# Altium PCB pcb_take1.PcbDoc (part 1 of 3)
Units mm, origin at the board's own origin, x right, y up, seen from the top; angles counter-clockwise.
Board outline 120 x 150 mm, 10 copper layers (Top Layer, Mid-Layer 1, Internal Plane 1, Internal Plane 2, Mid-Layer 2, MidLayer3, Mid-Layer 4, Mid-Layer 5, Mid-Layer 6, Bottom Layer); 173 components, 196 nets, 996 pads, 586 vias.
Unrouted connection lines stored in the file: 1.
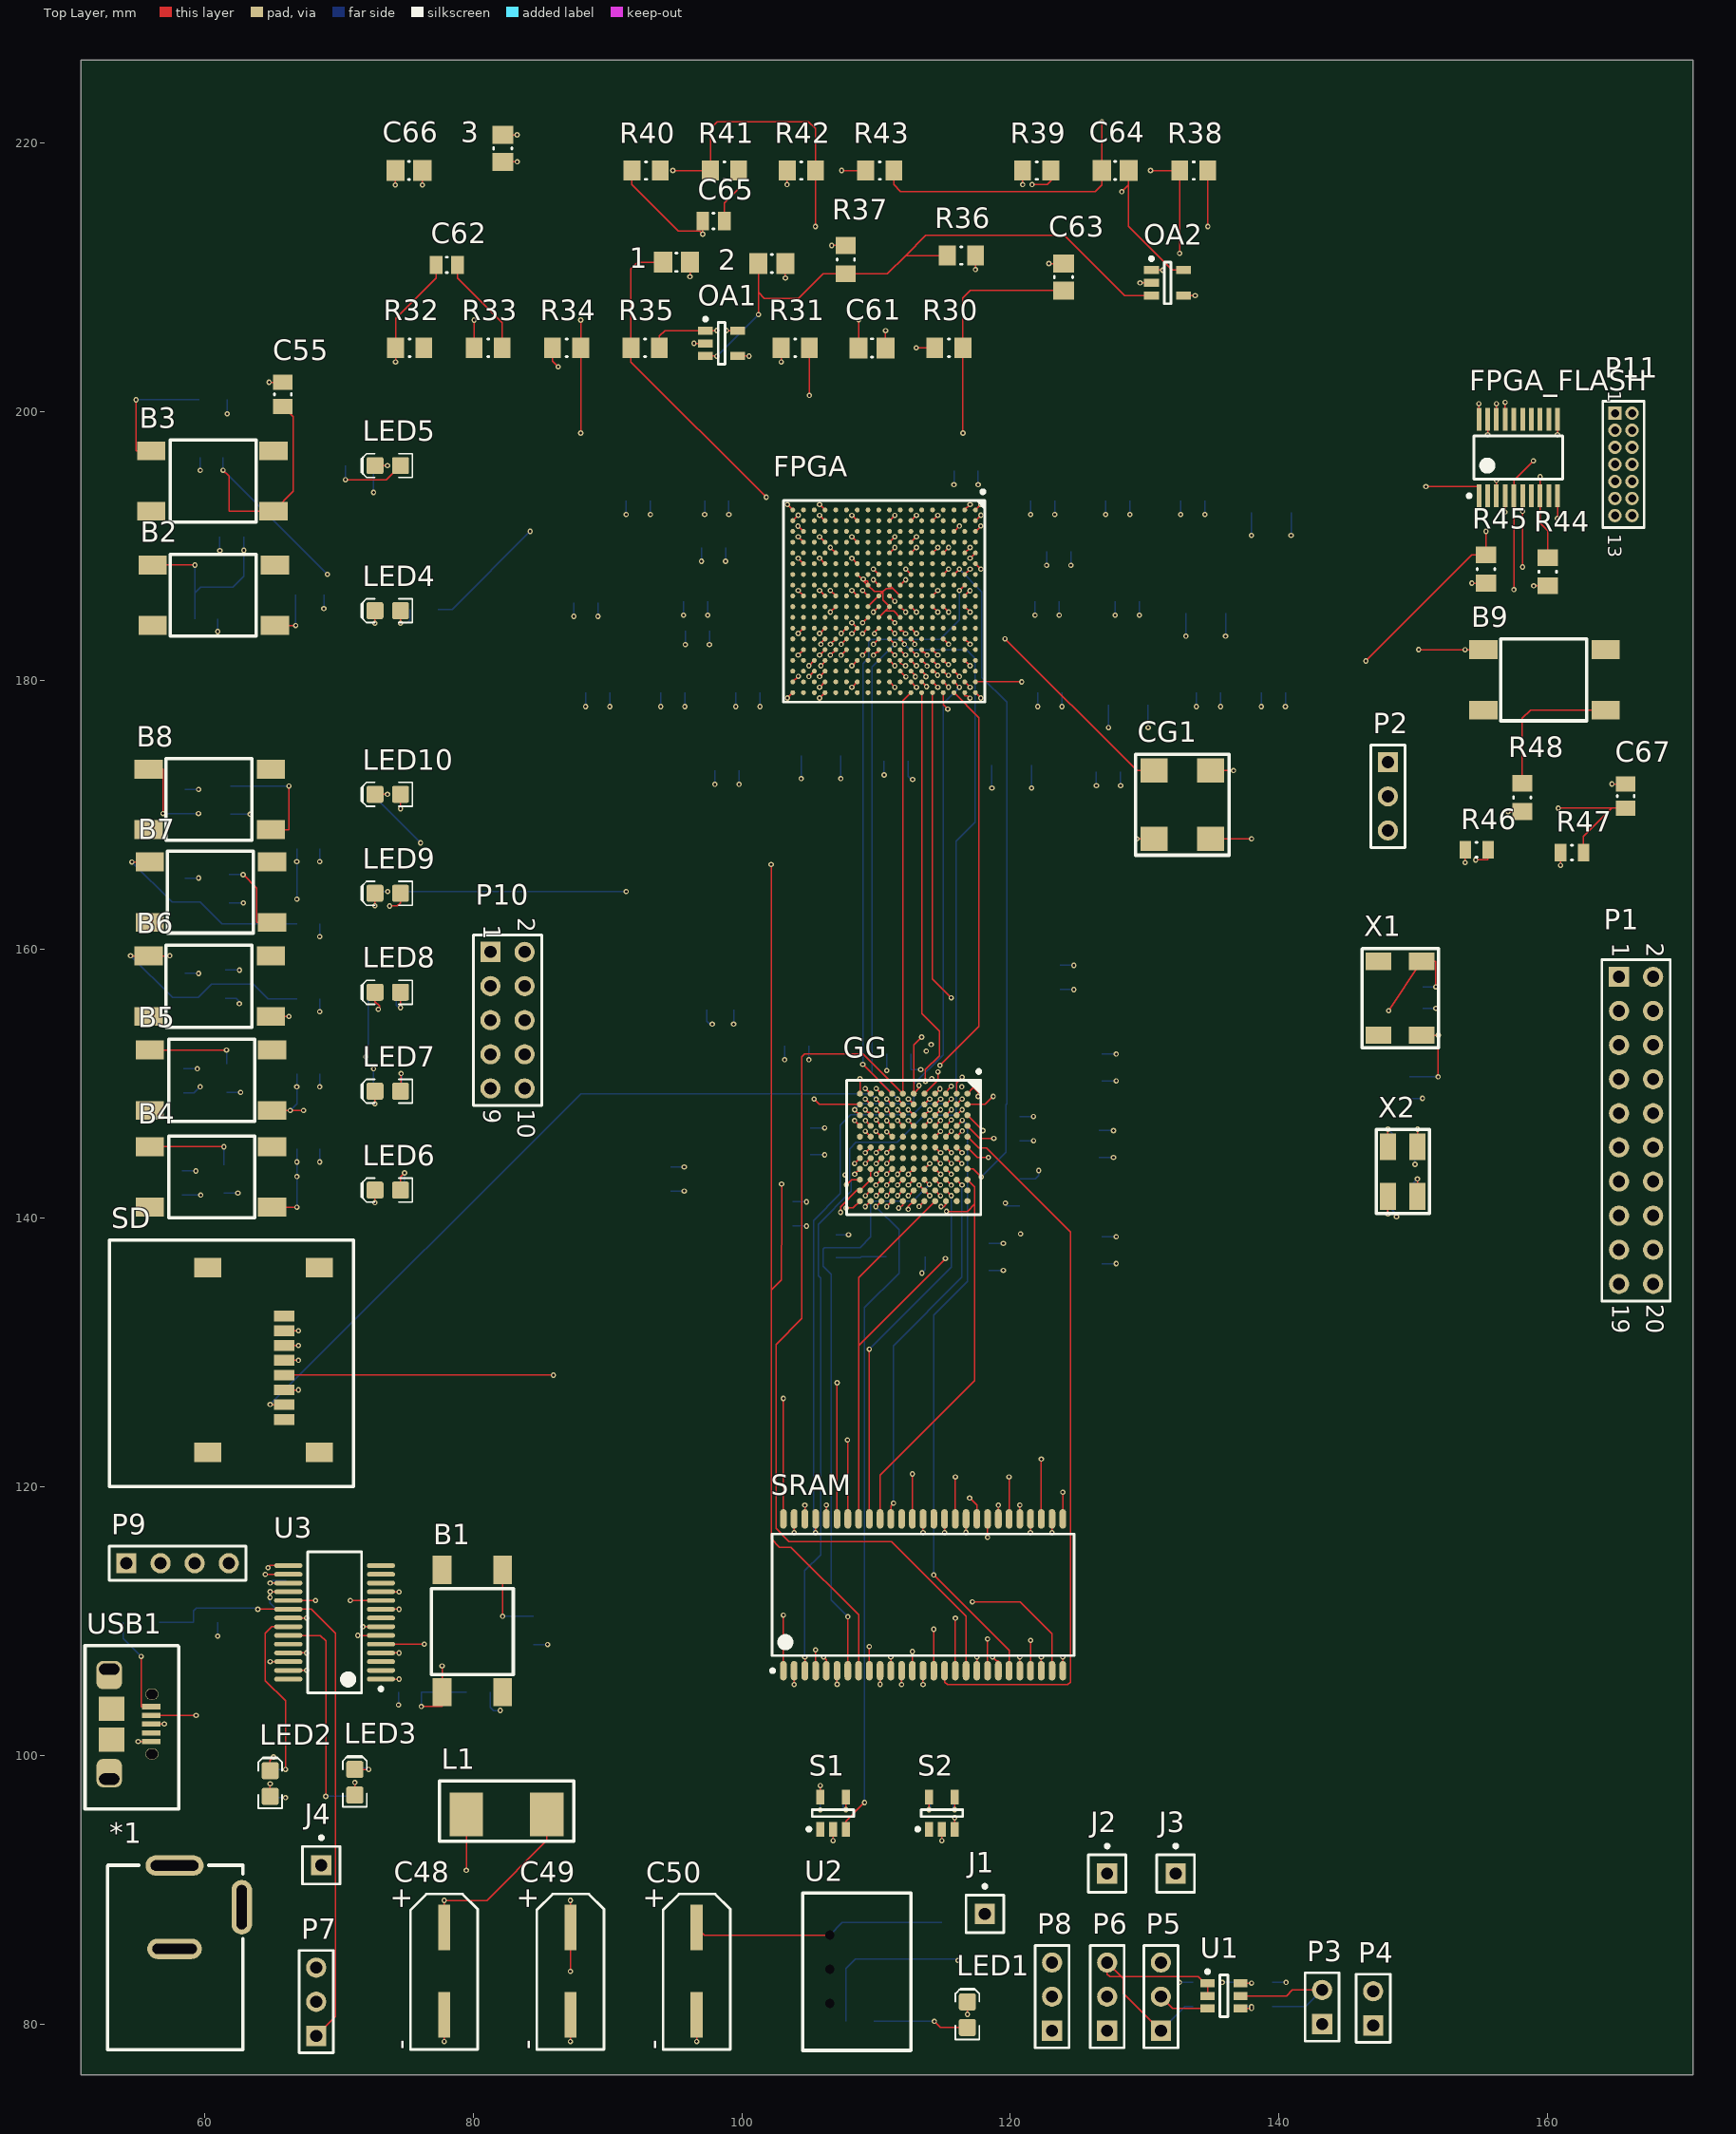
[diagram p0: Top Layer view]
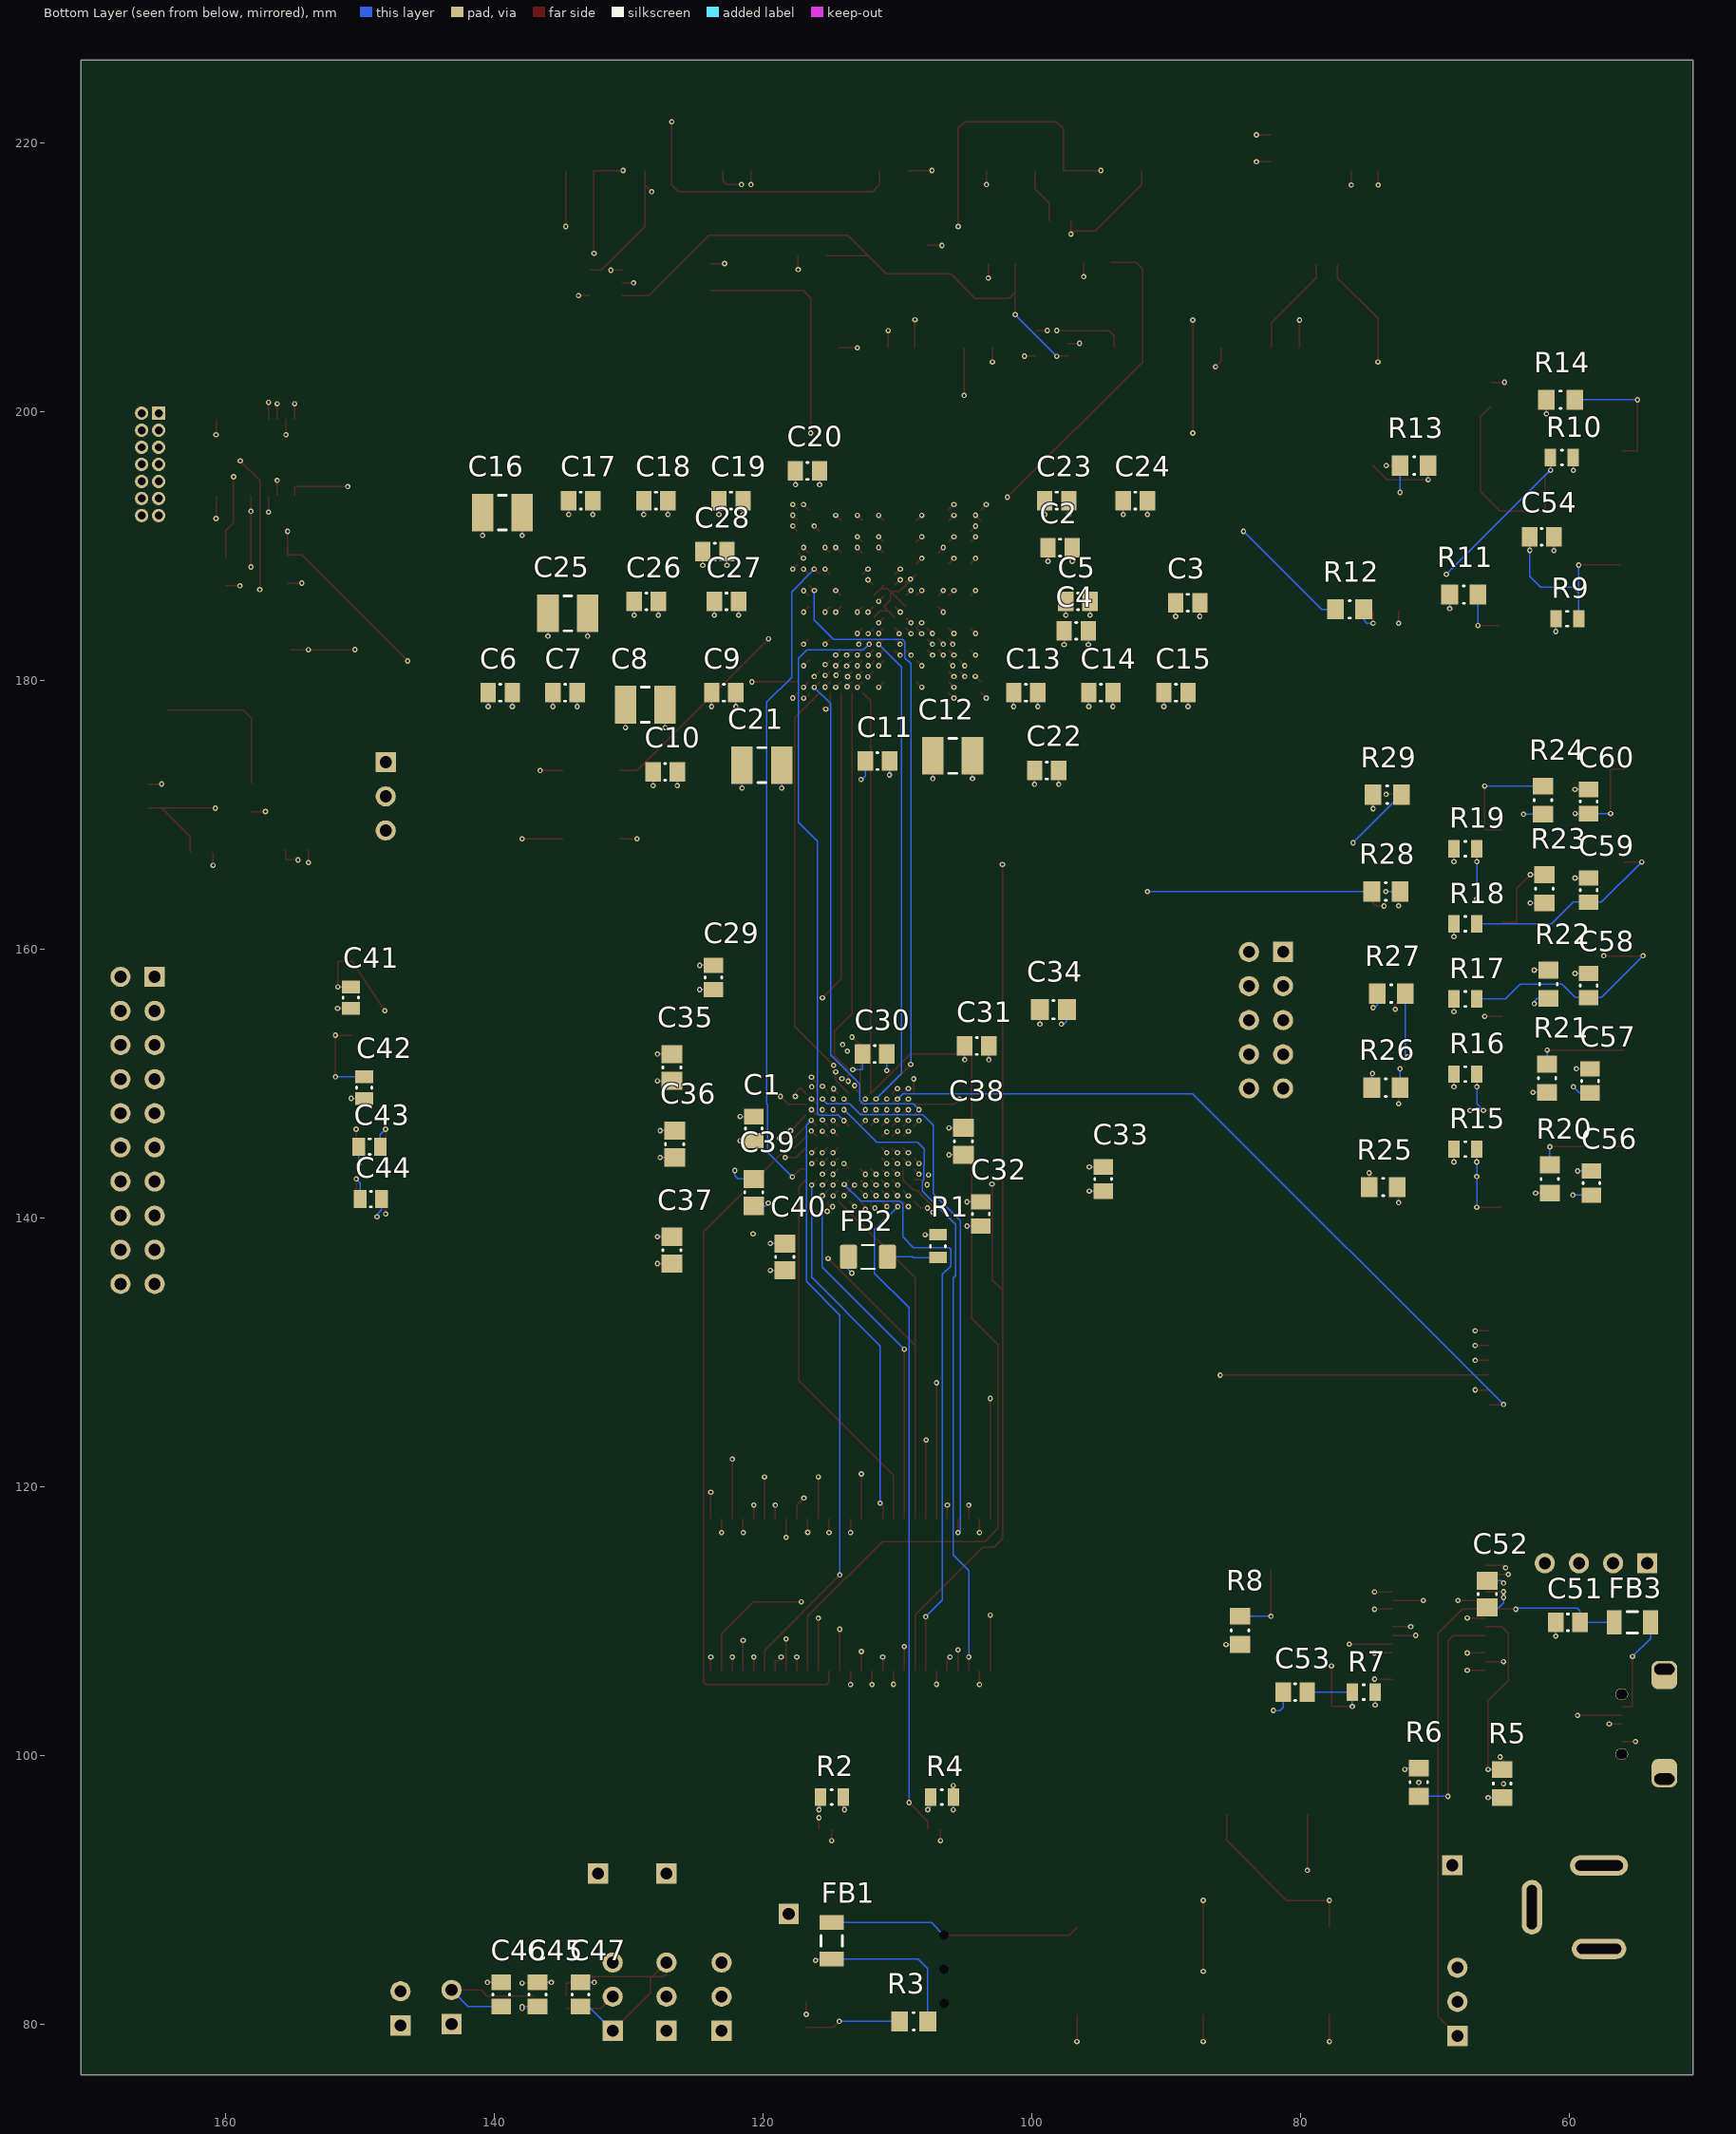
[diagram p1: Bottom Layer view, seen from below]
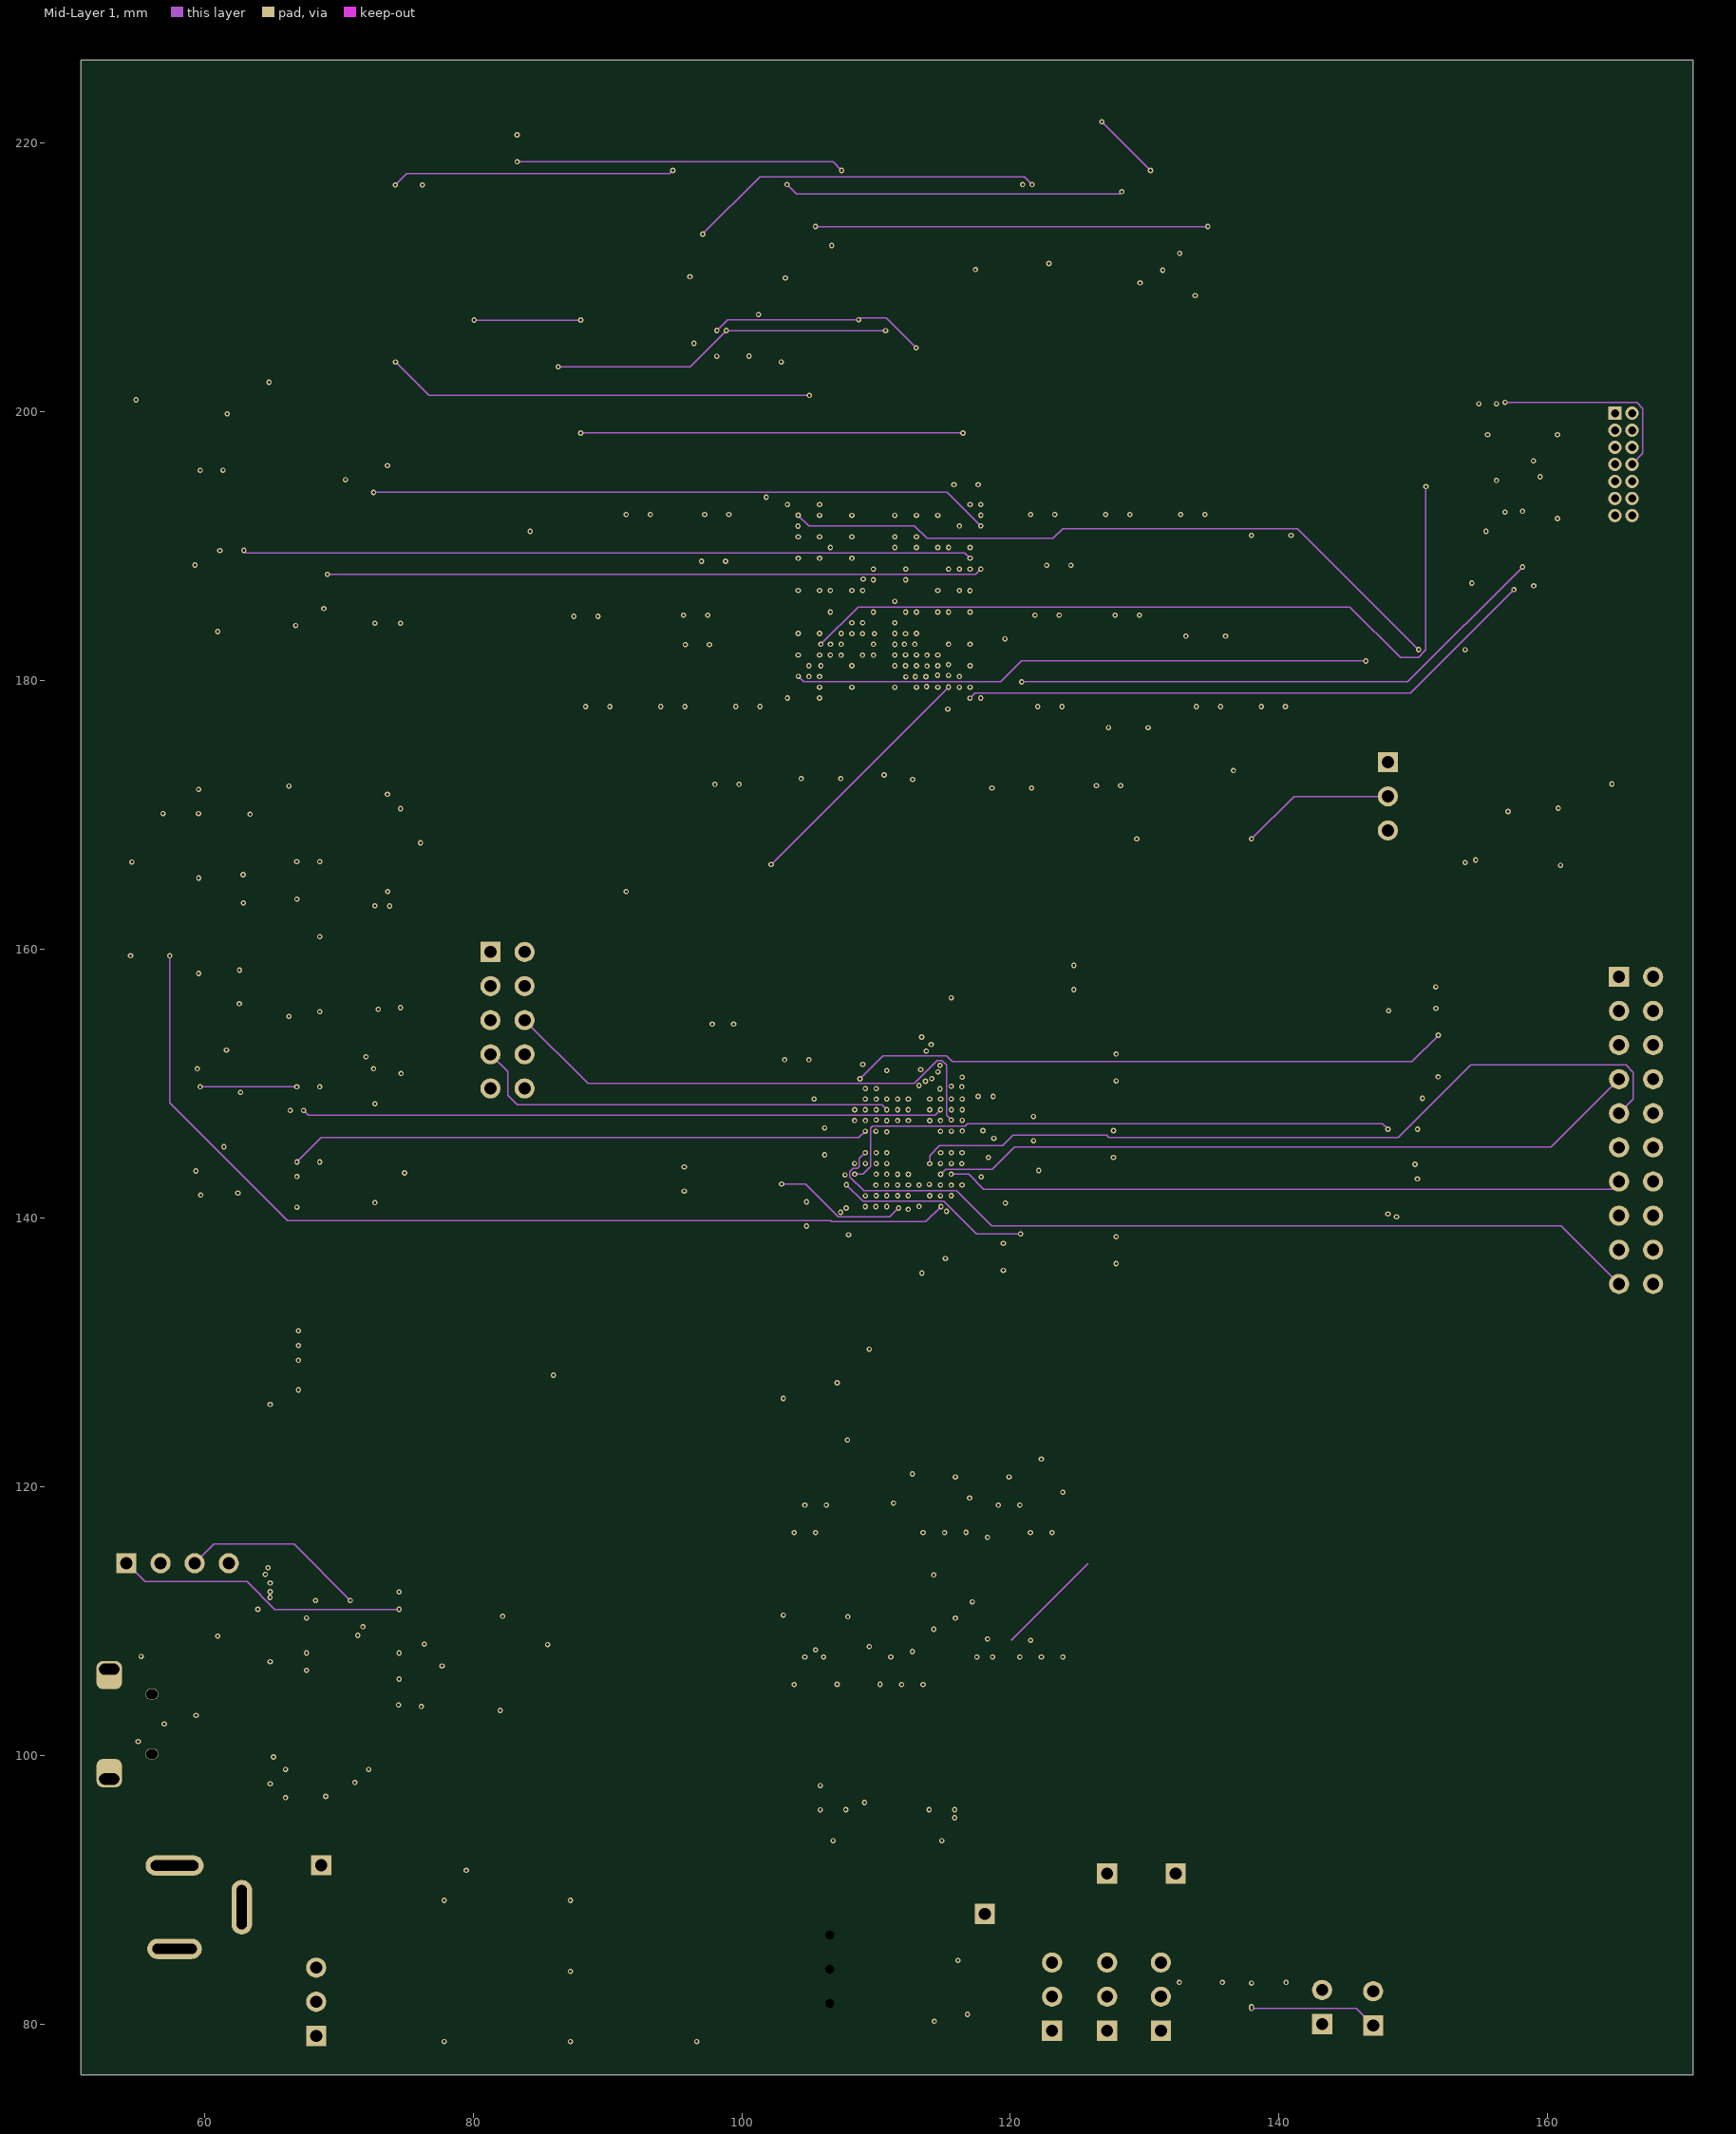
[diagram p2: Mid-Layer 1]
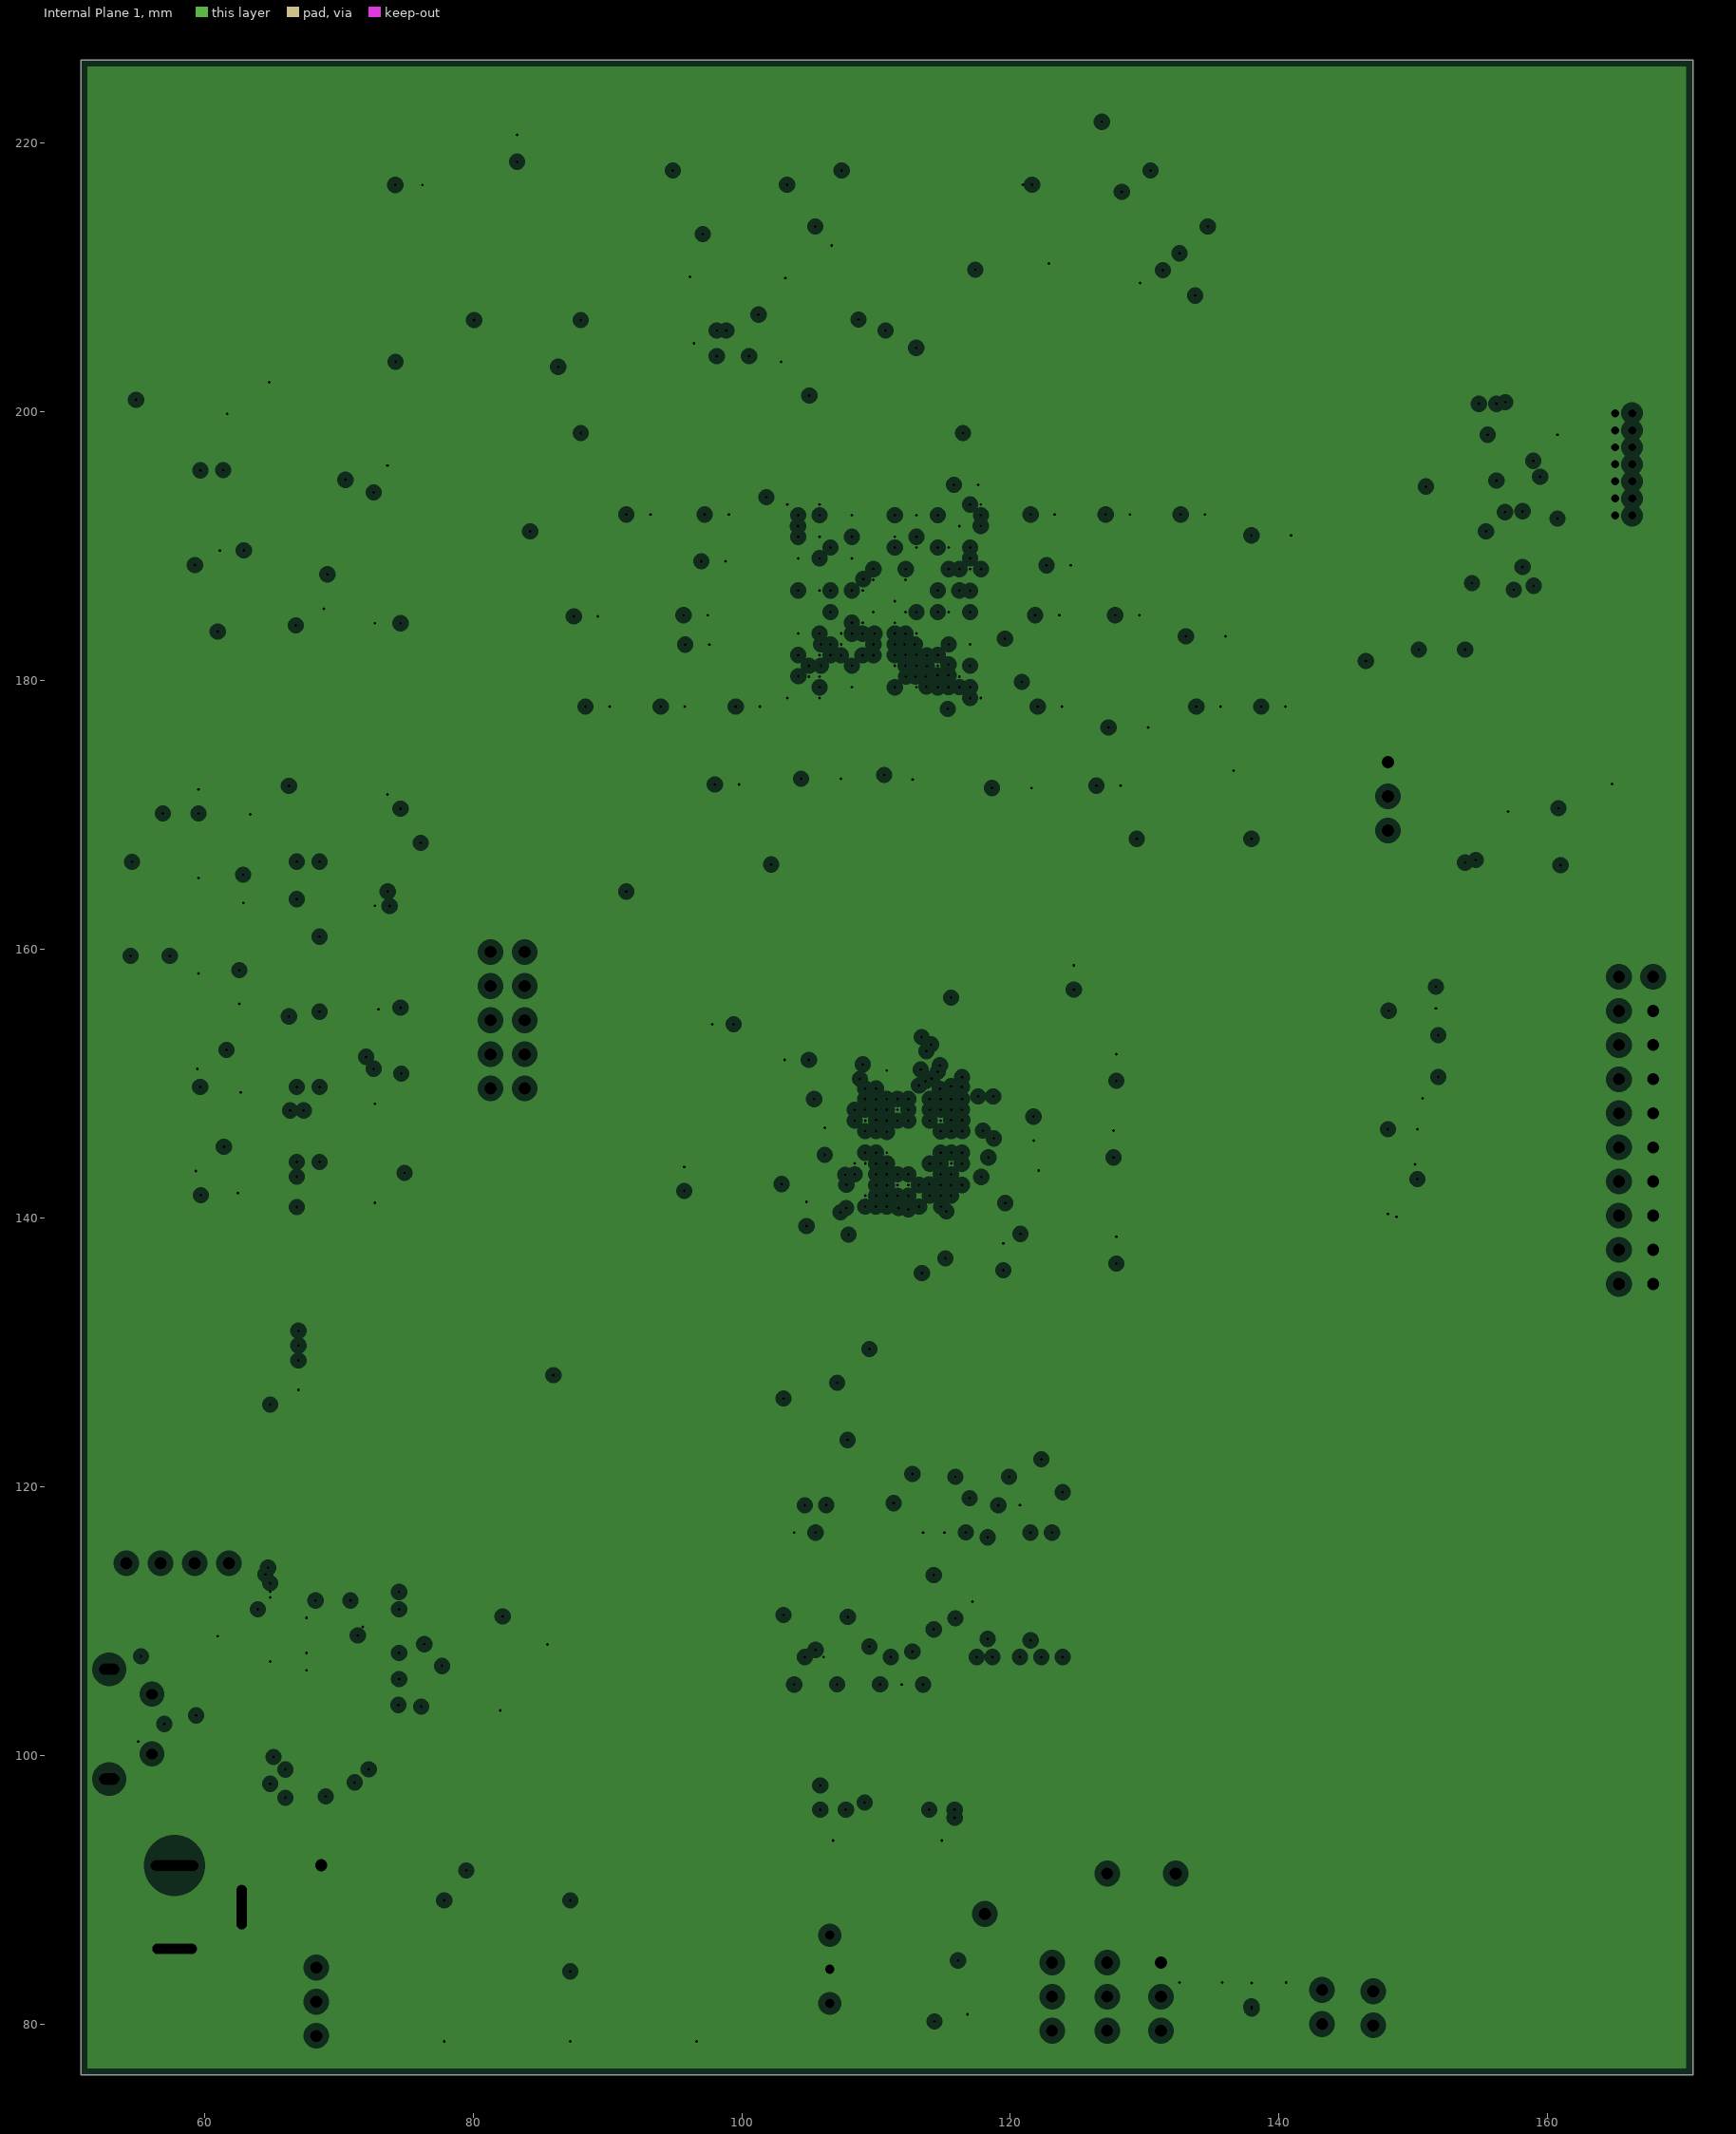
[diagram p3: Internal Plane 1, clearances drawn from the general rule]
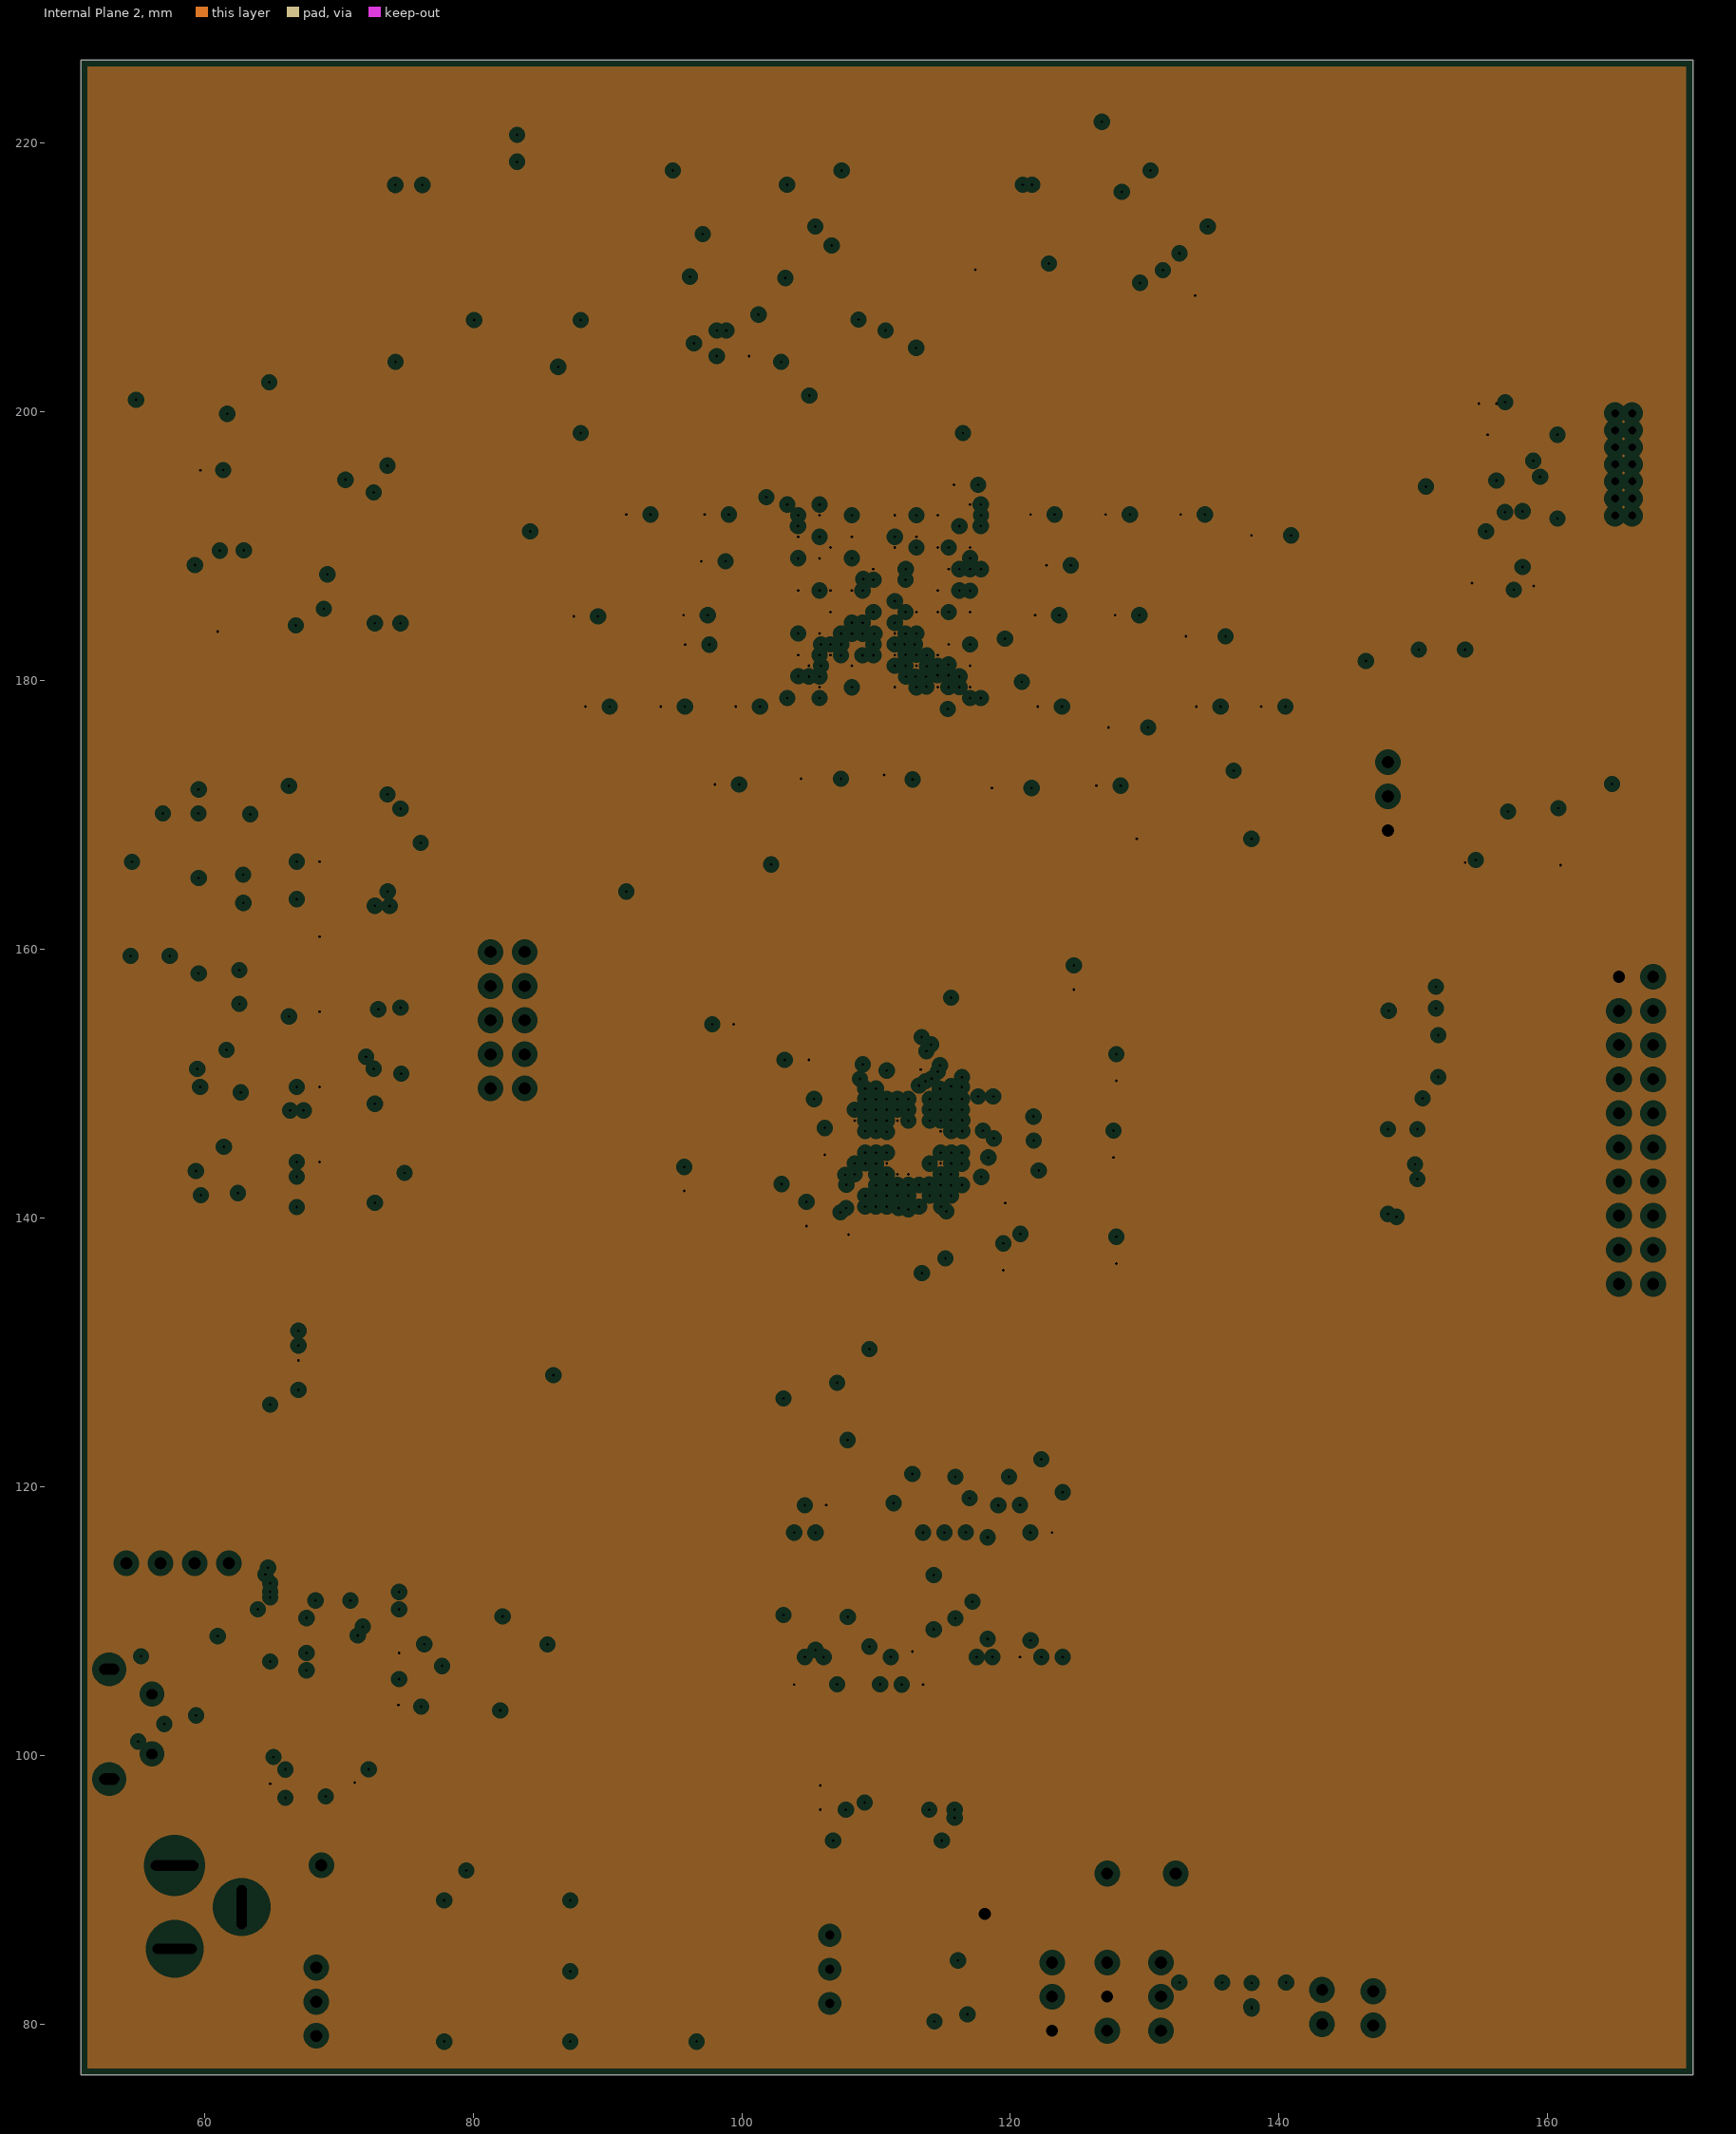
[diagram p4: Internal Plane 2, clearances drawn from the general rule]
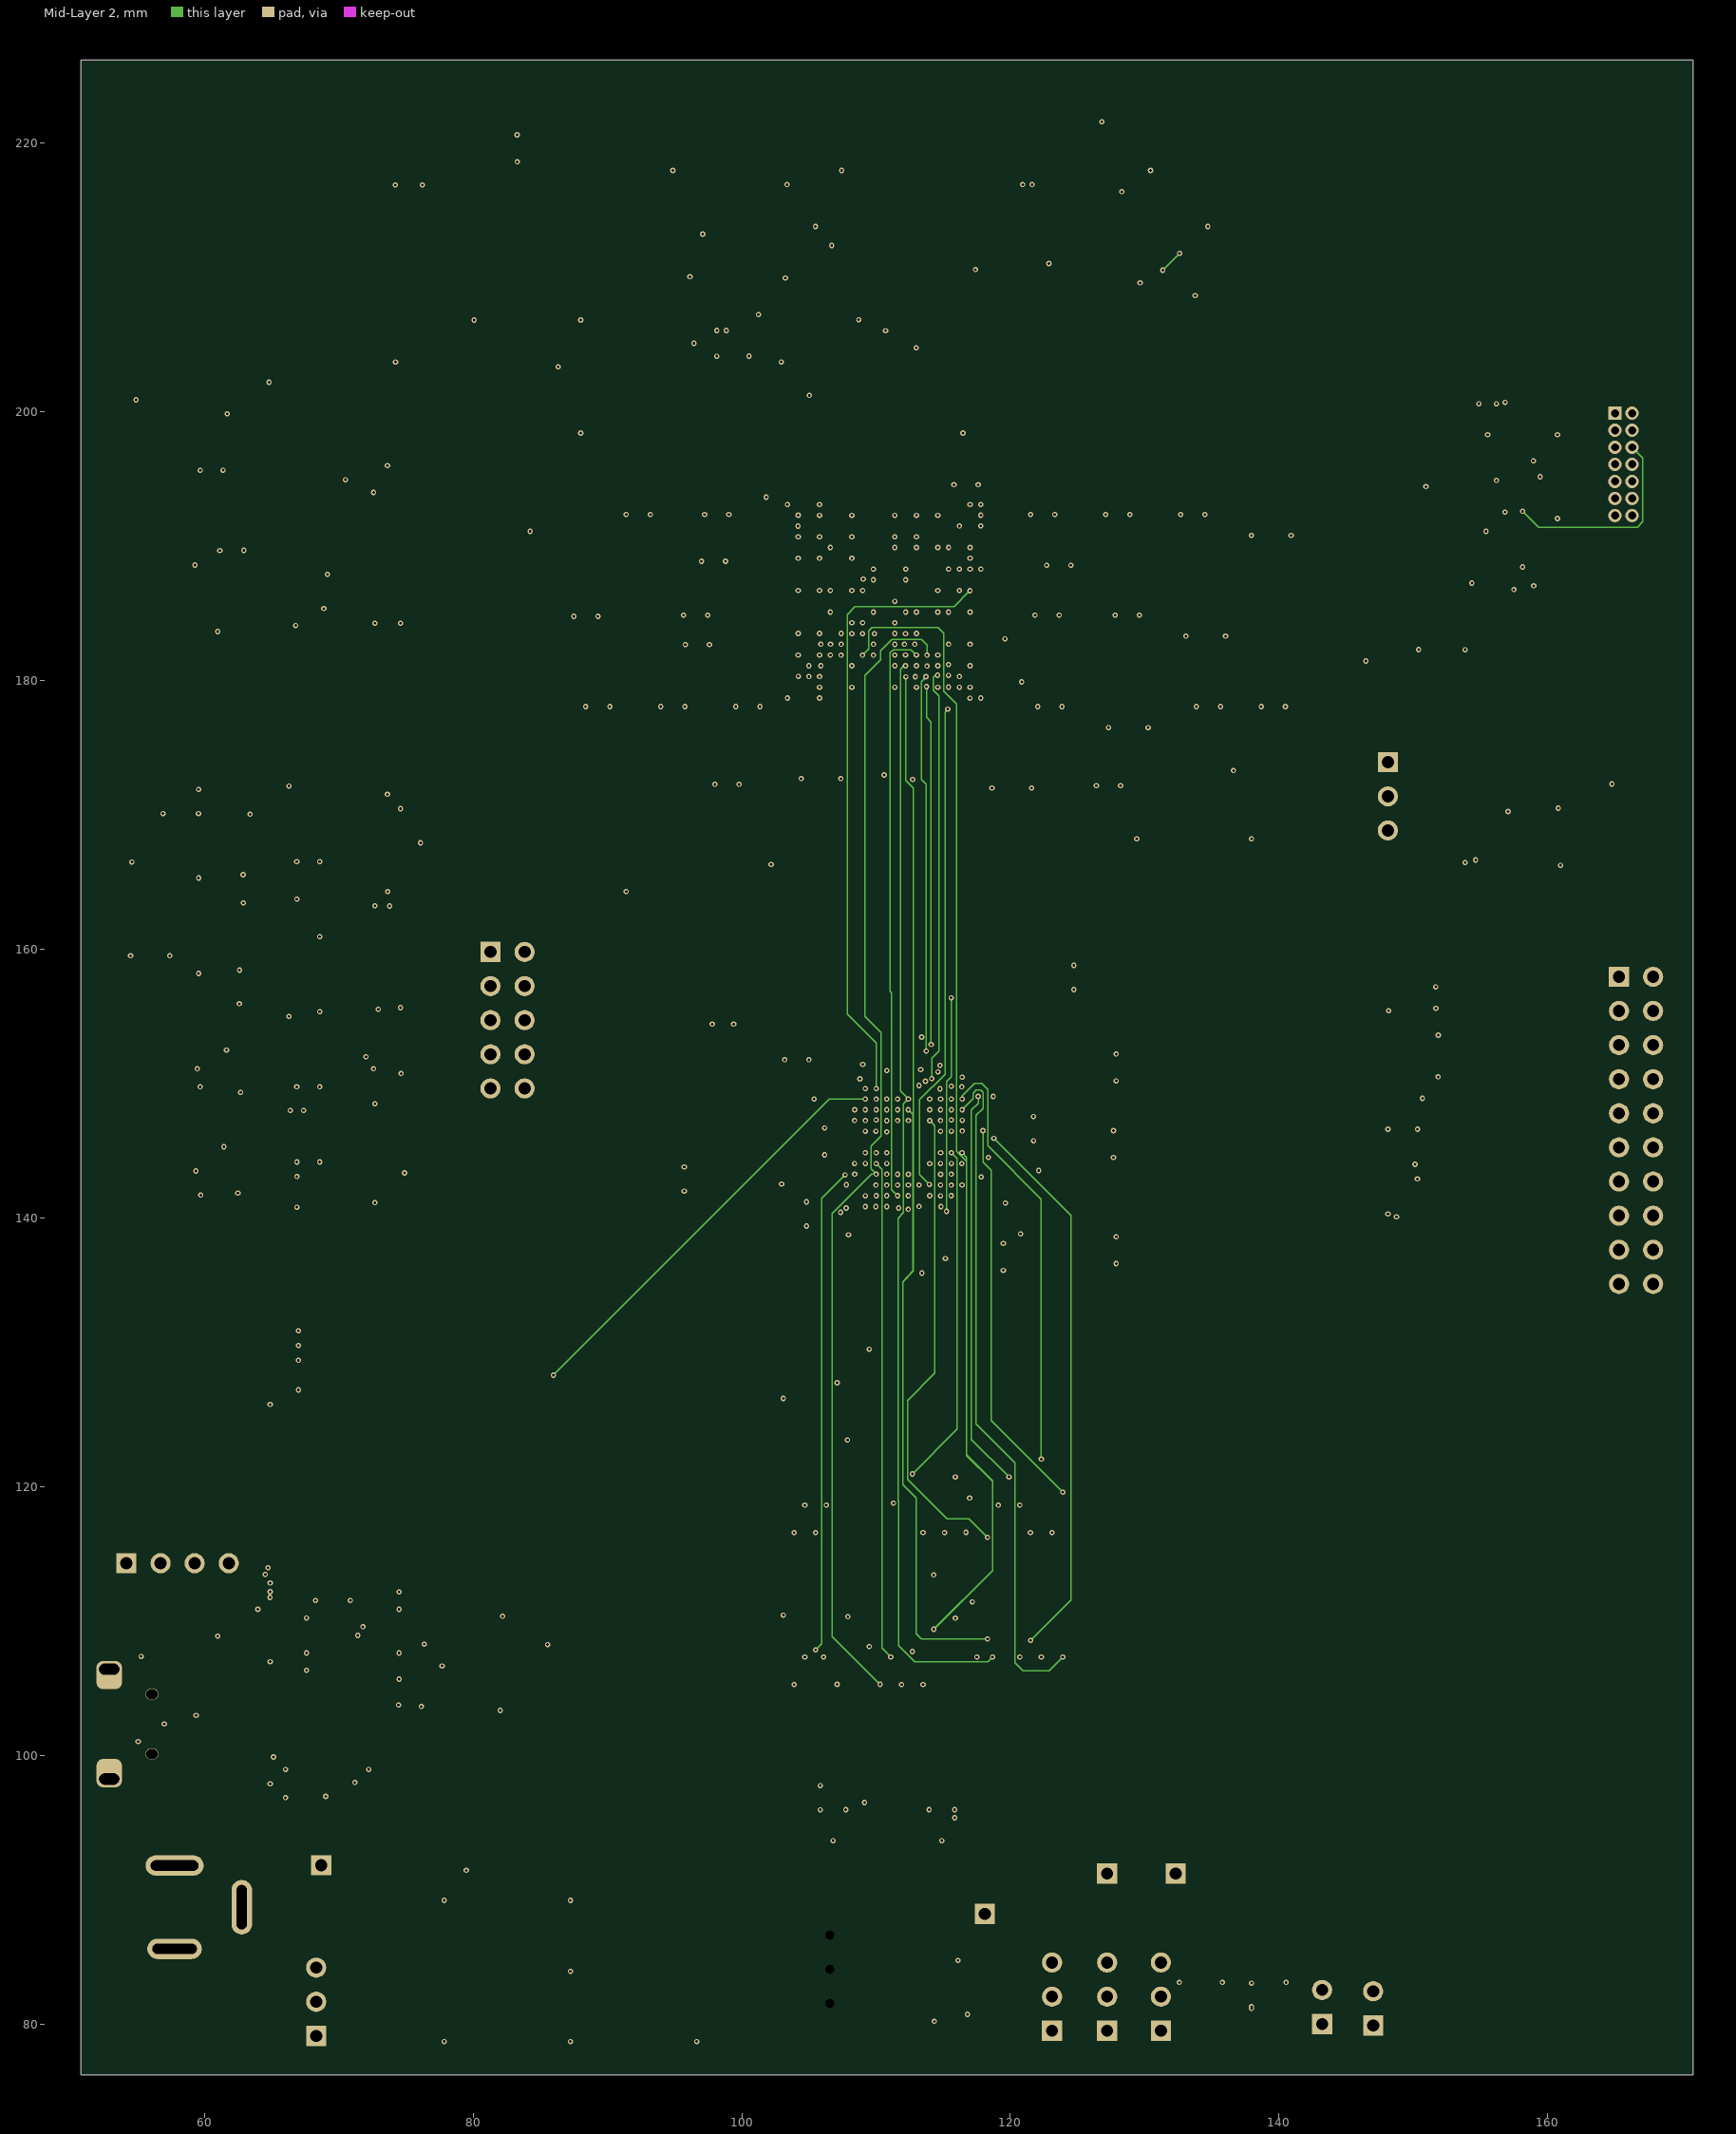
[diagram p5: Mid-Layer 2]
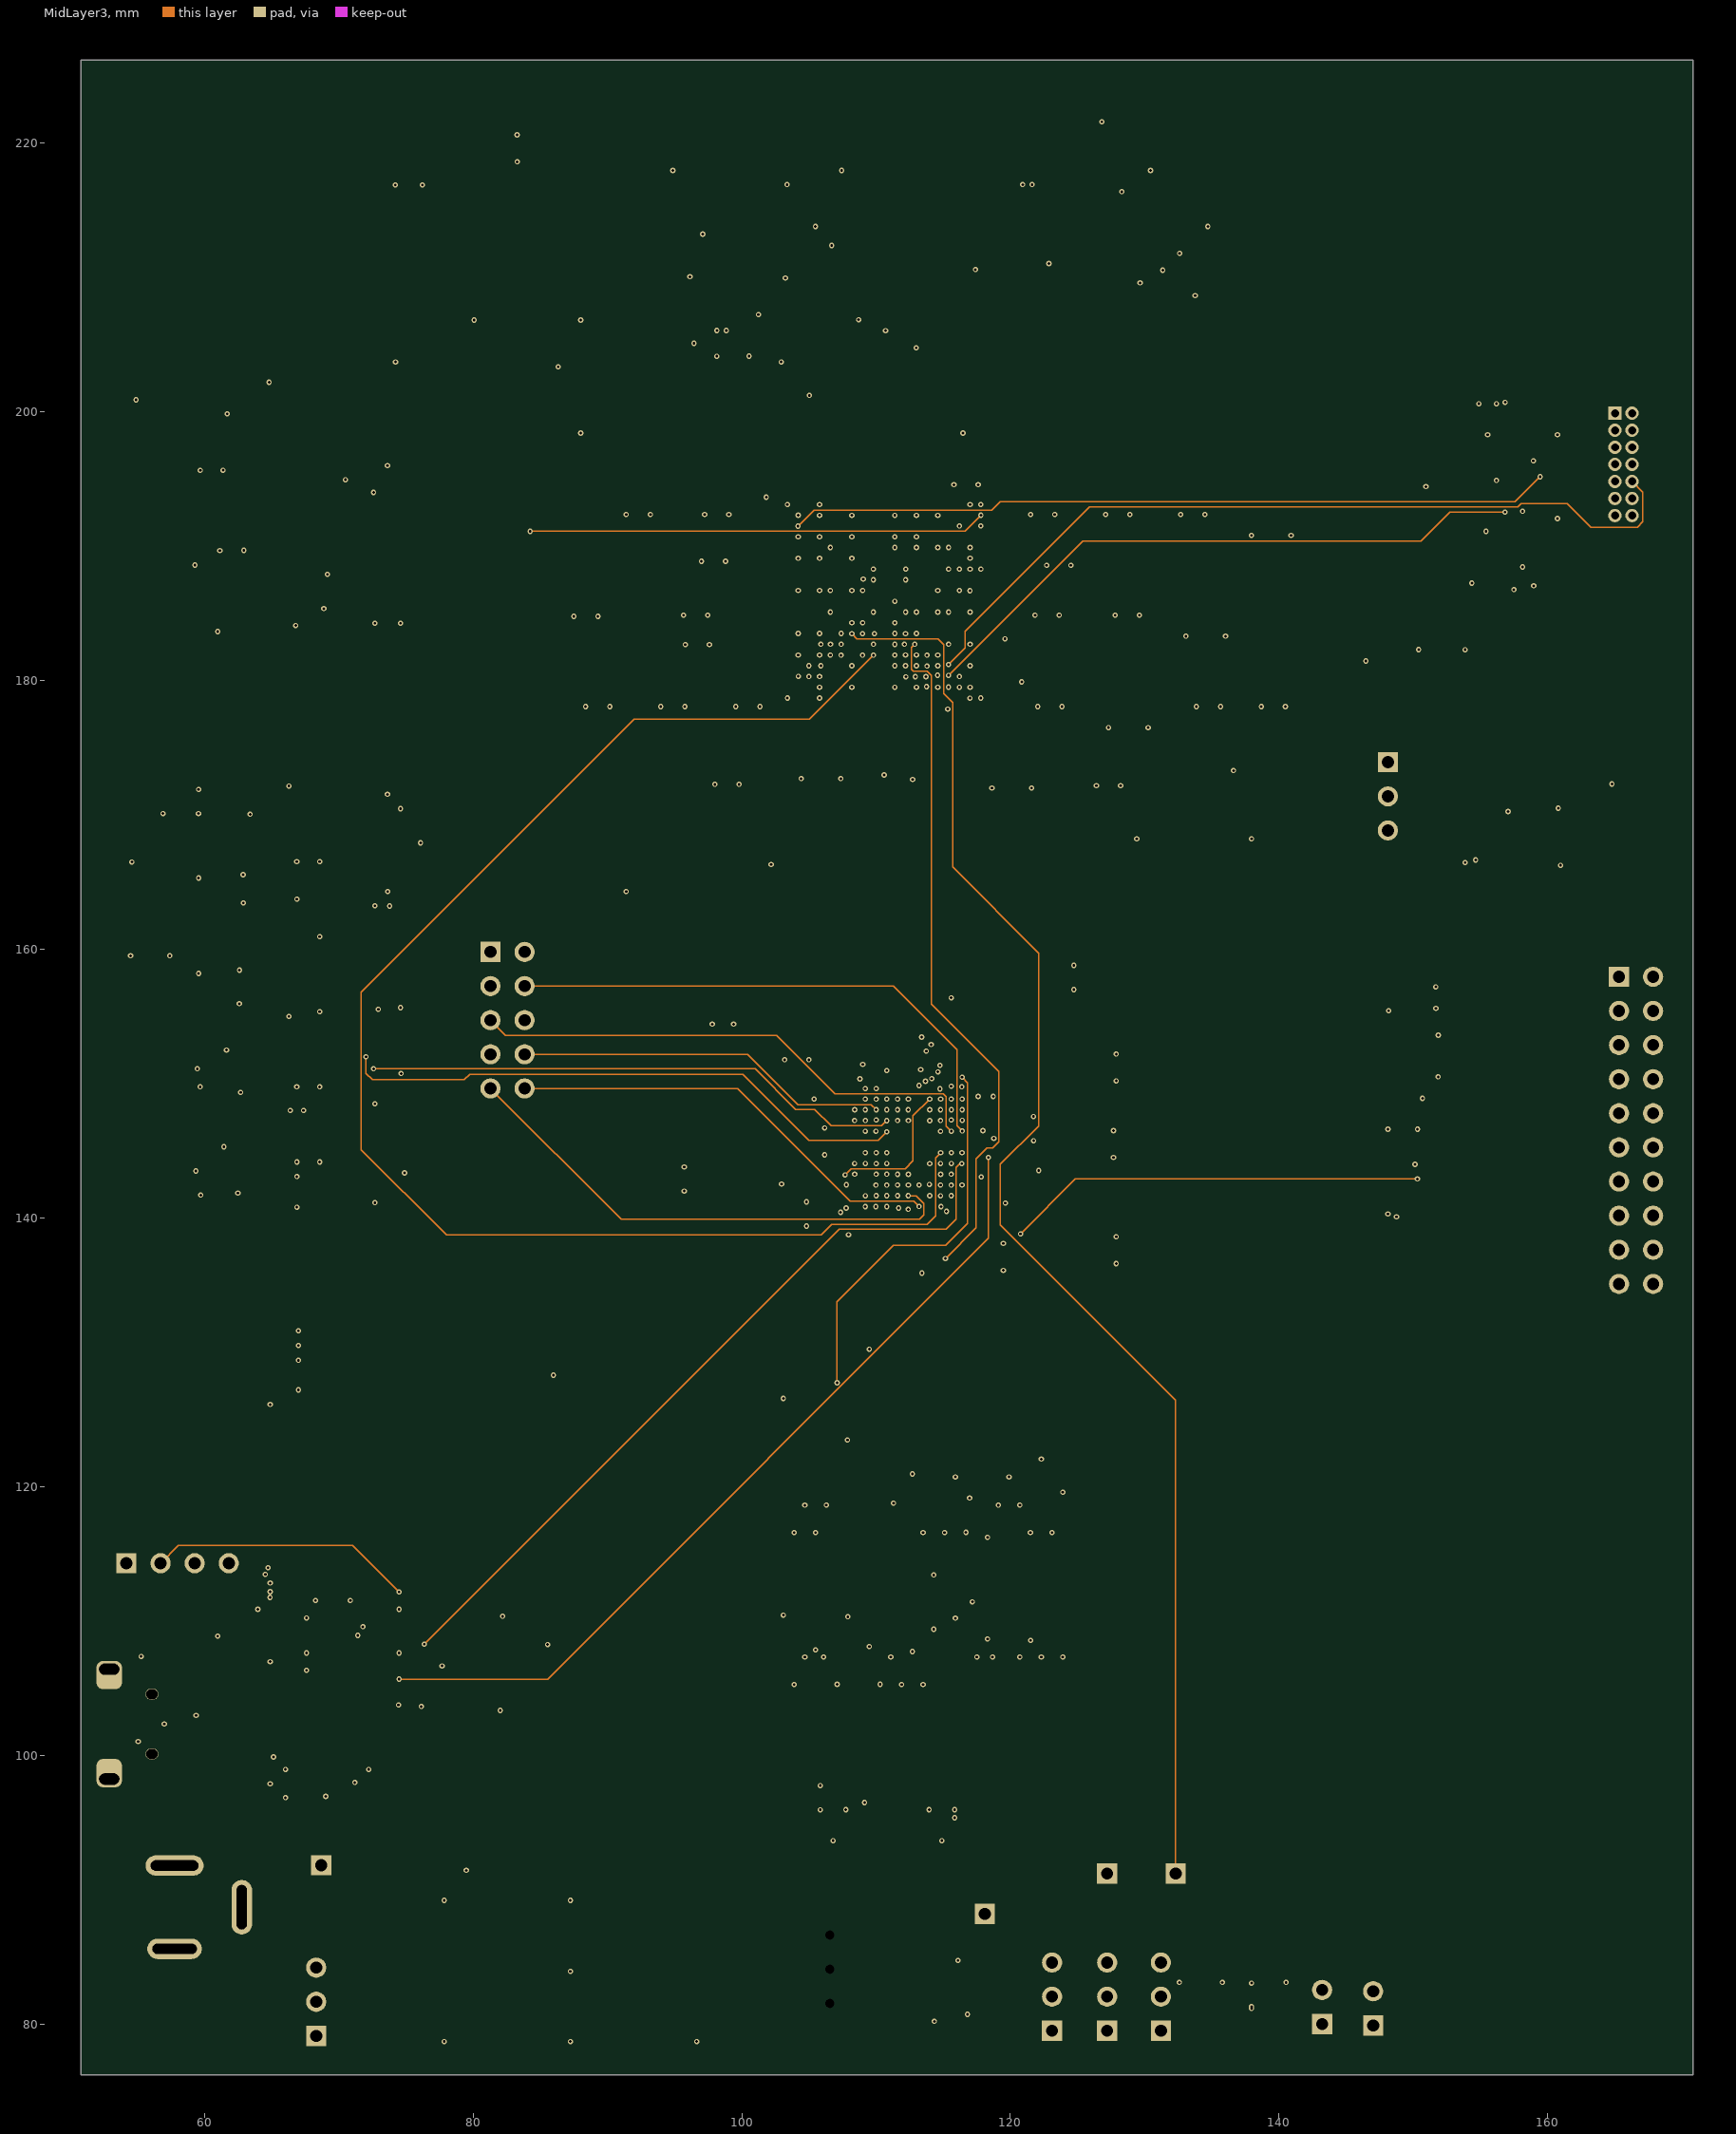
[diagram p6: MidLayer3]
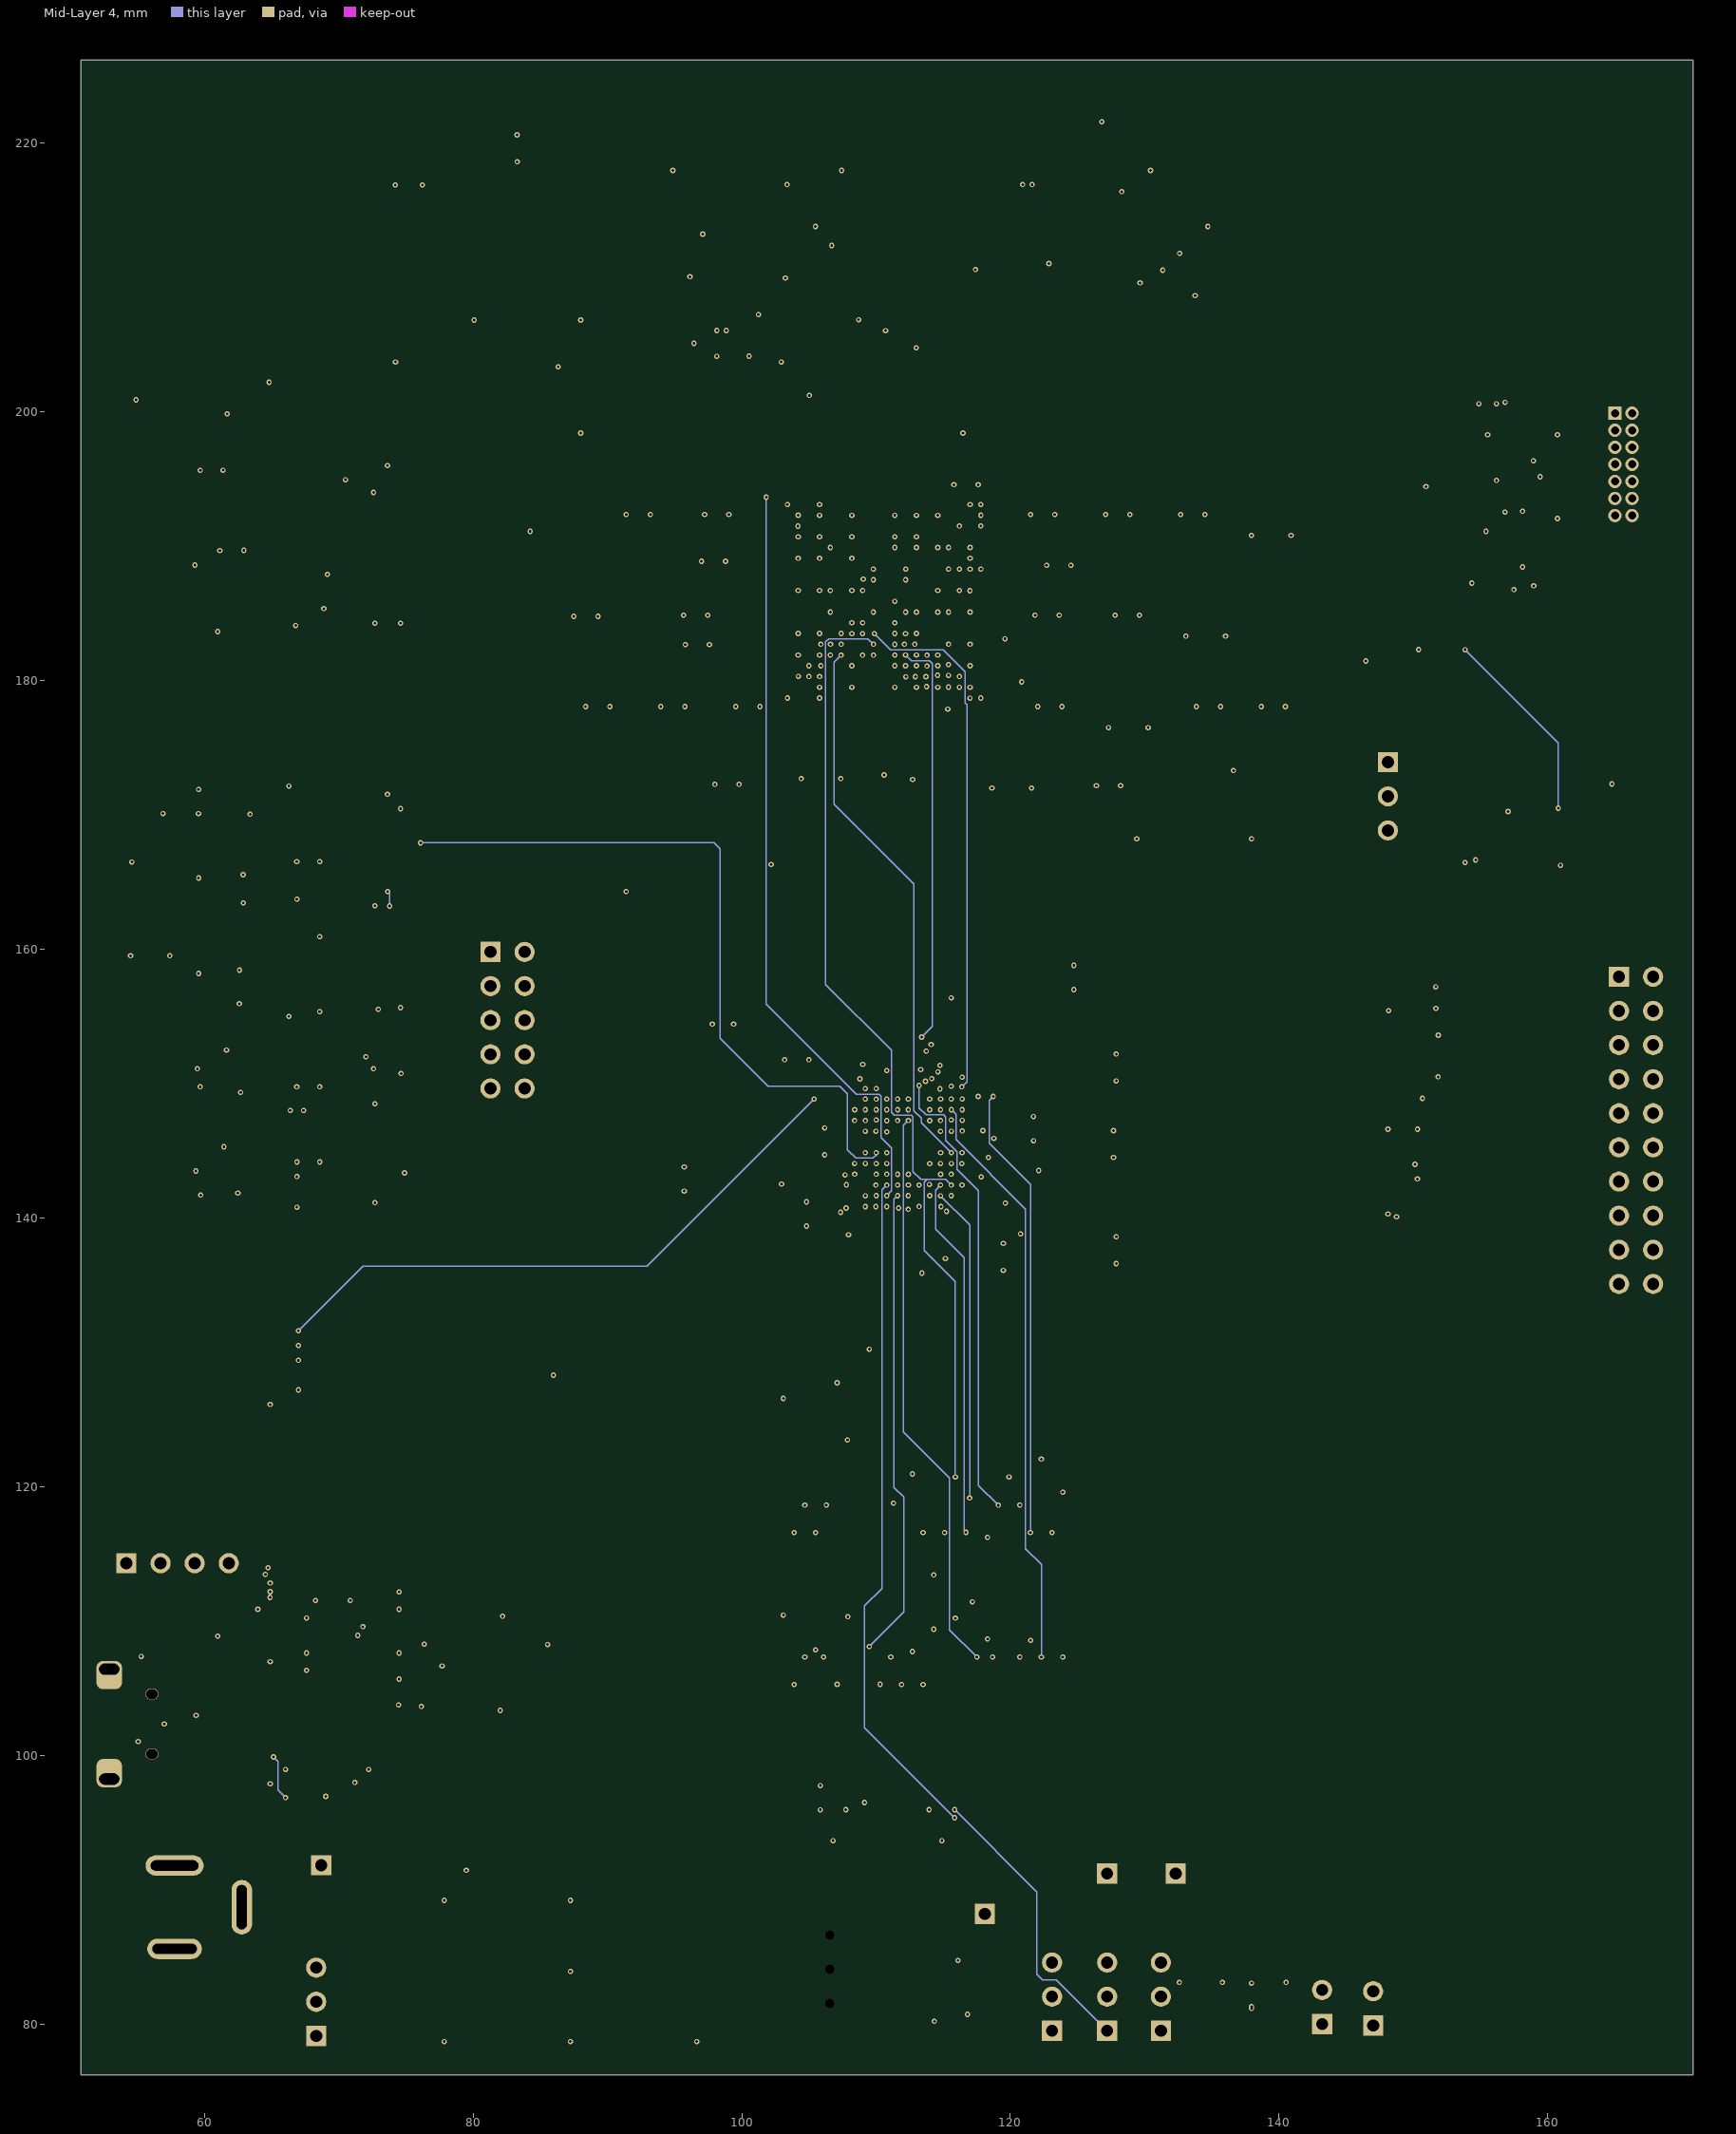
[diagram p7: Mid-Layer 4]
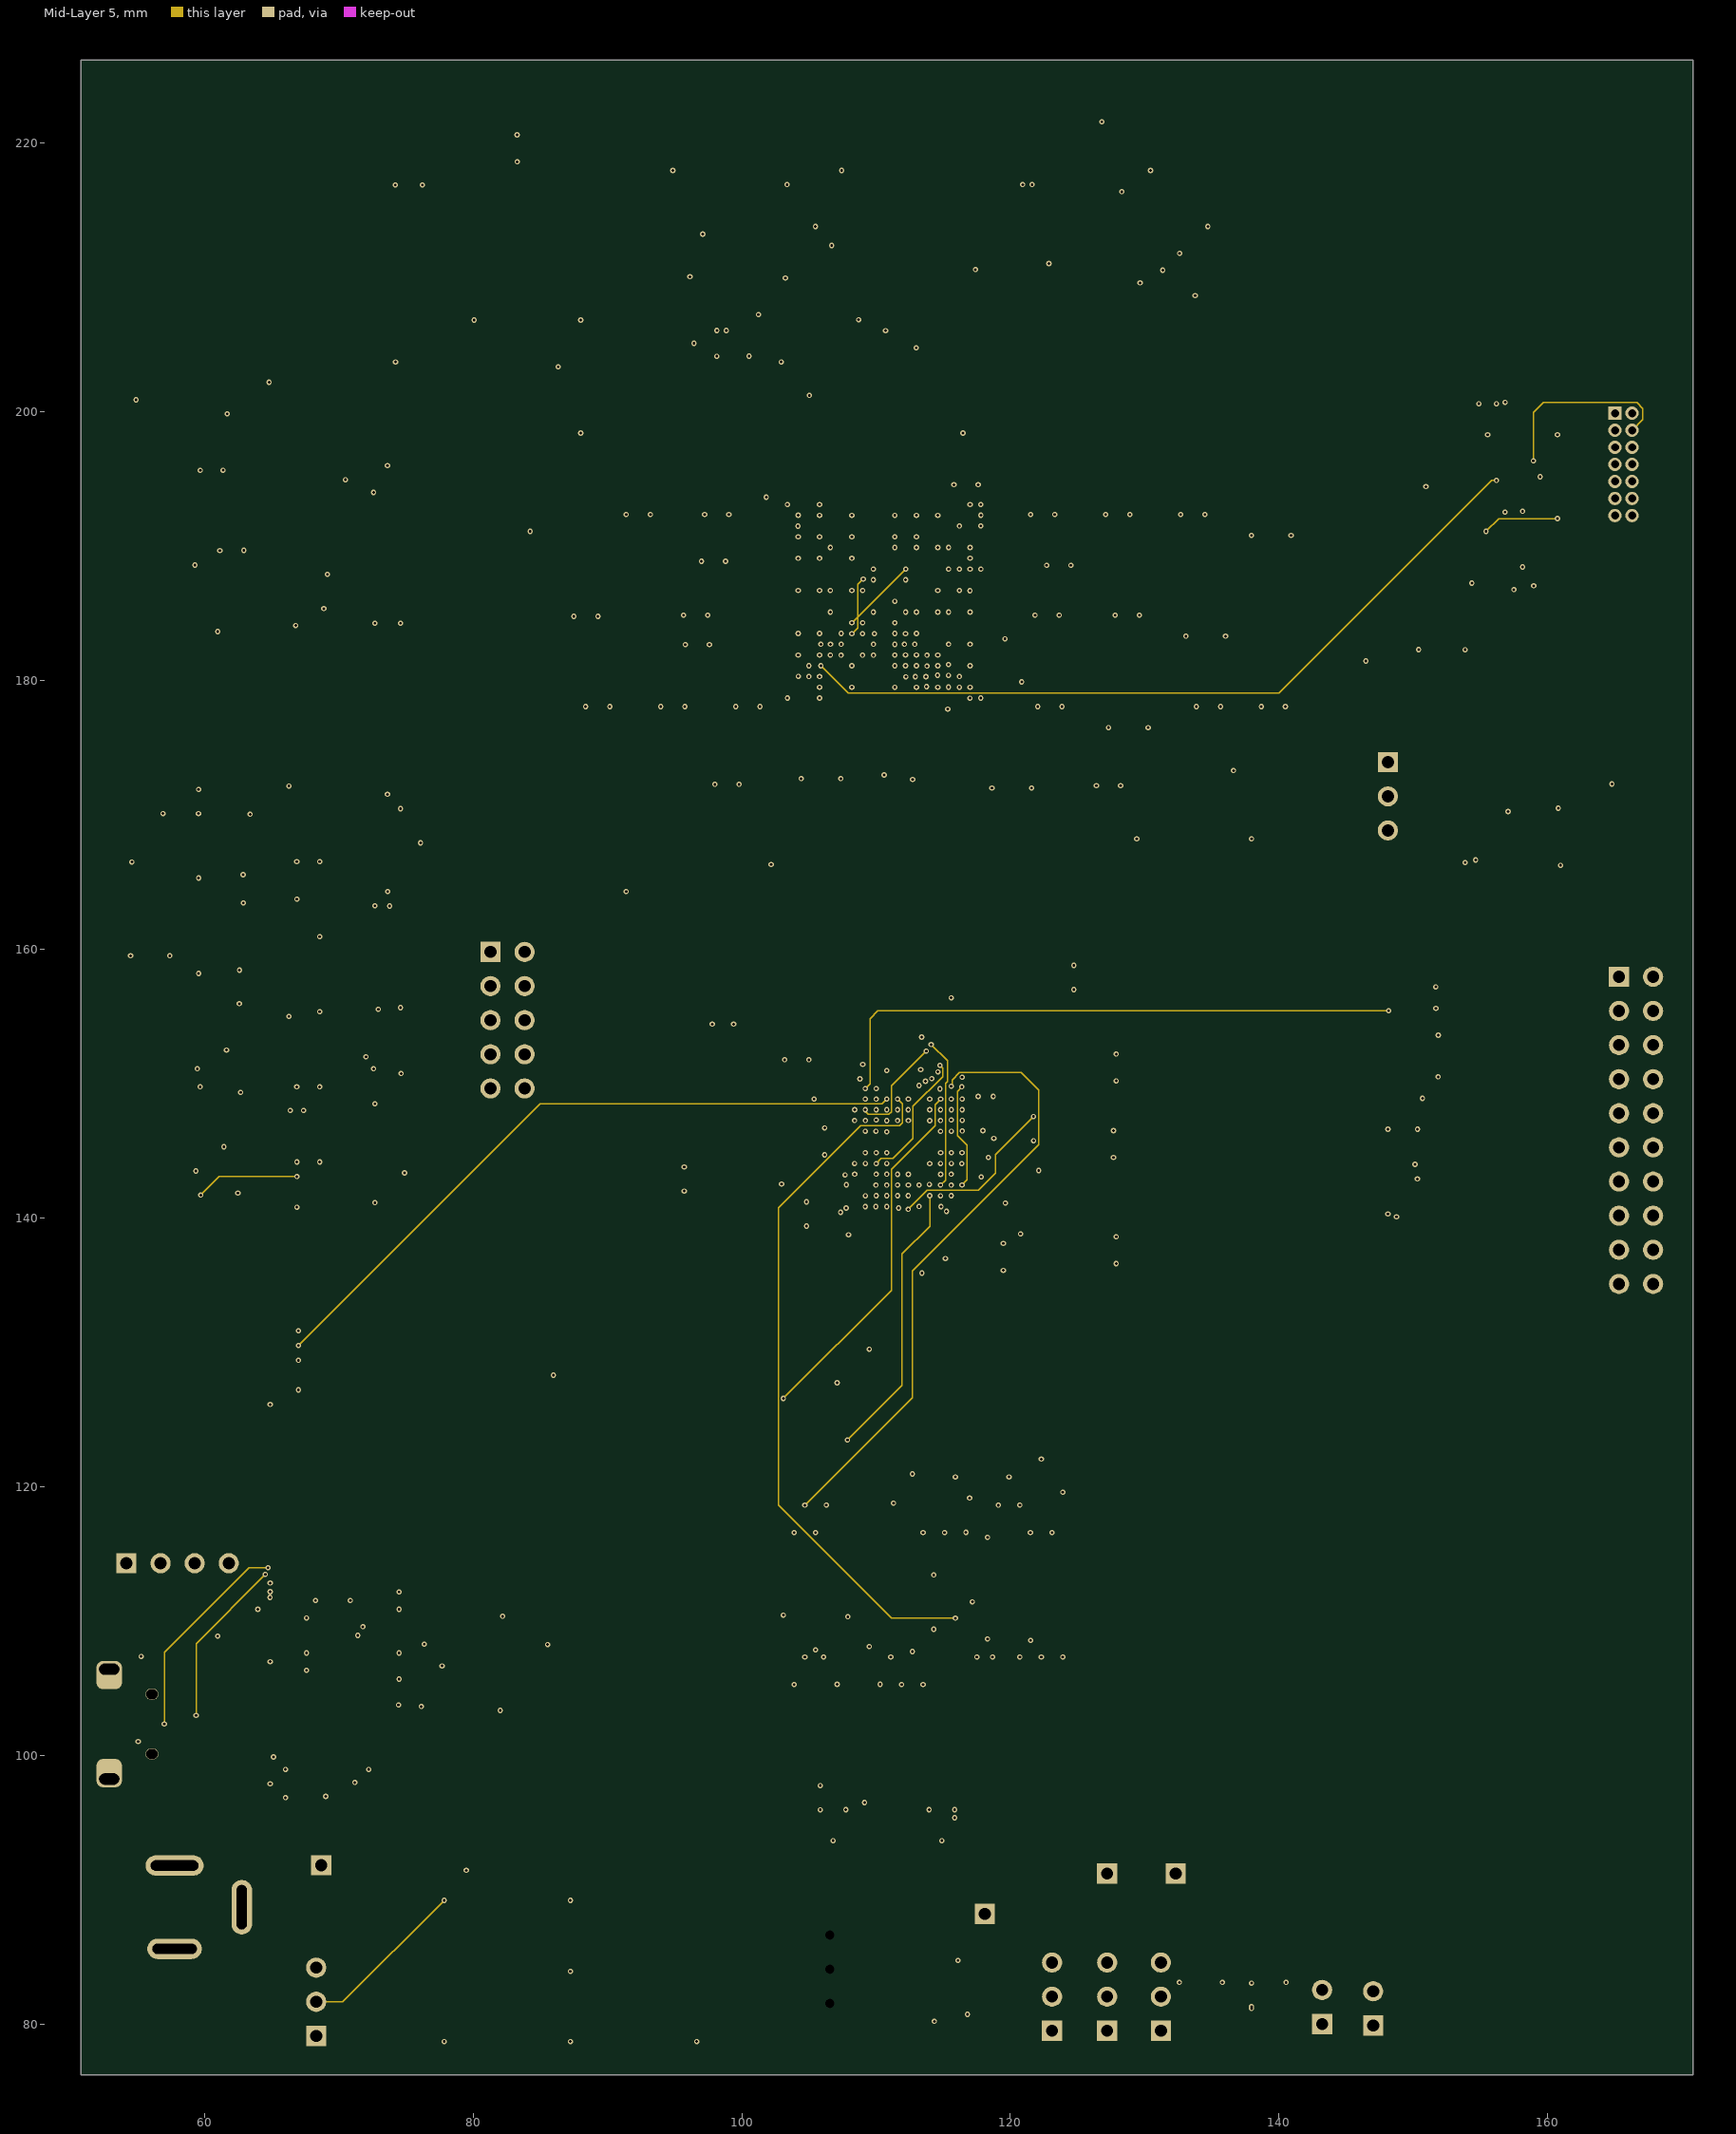
[diagram p8: Mid-Layer 5]
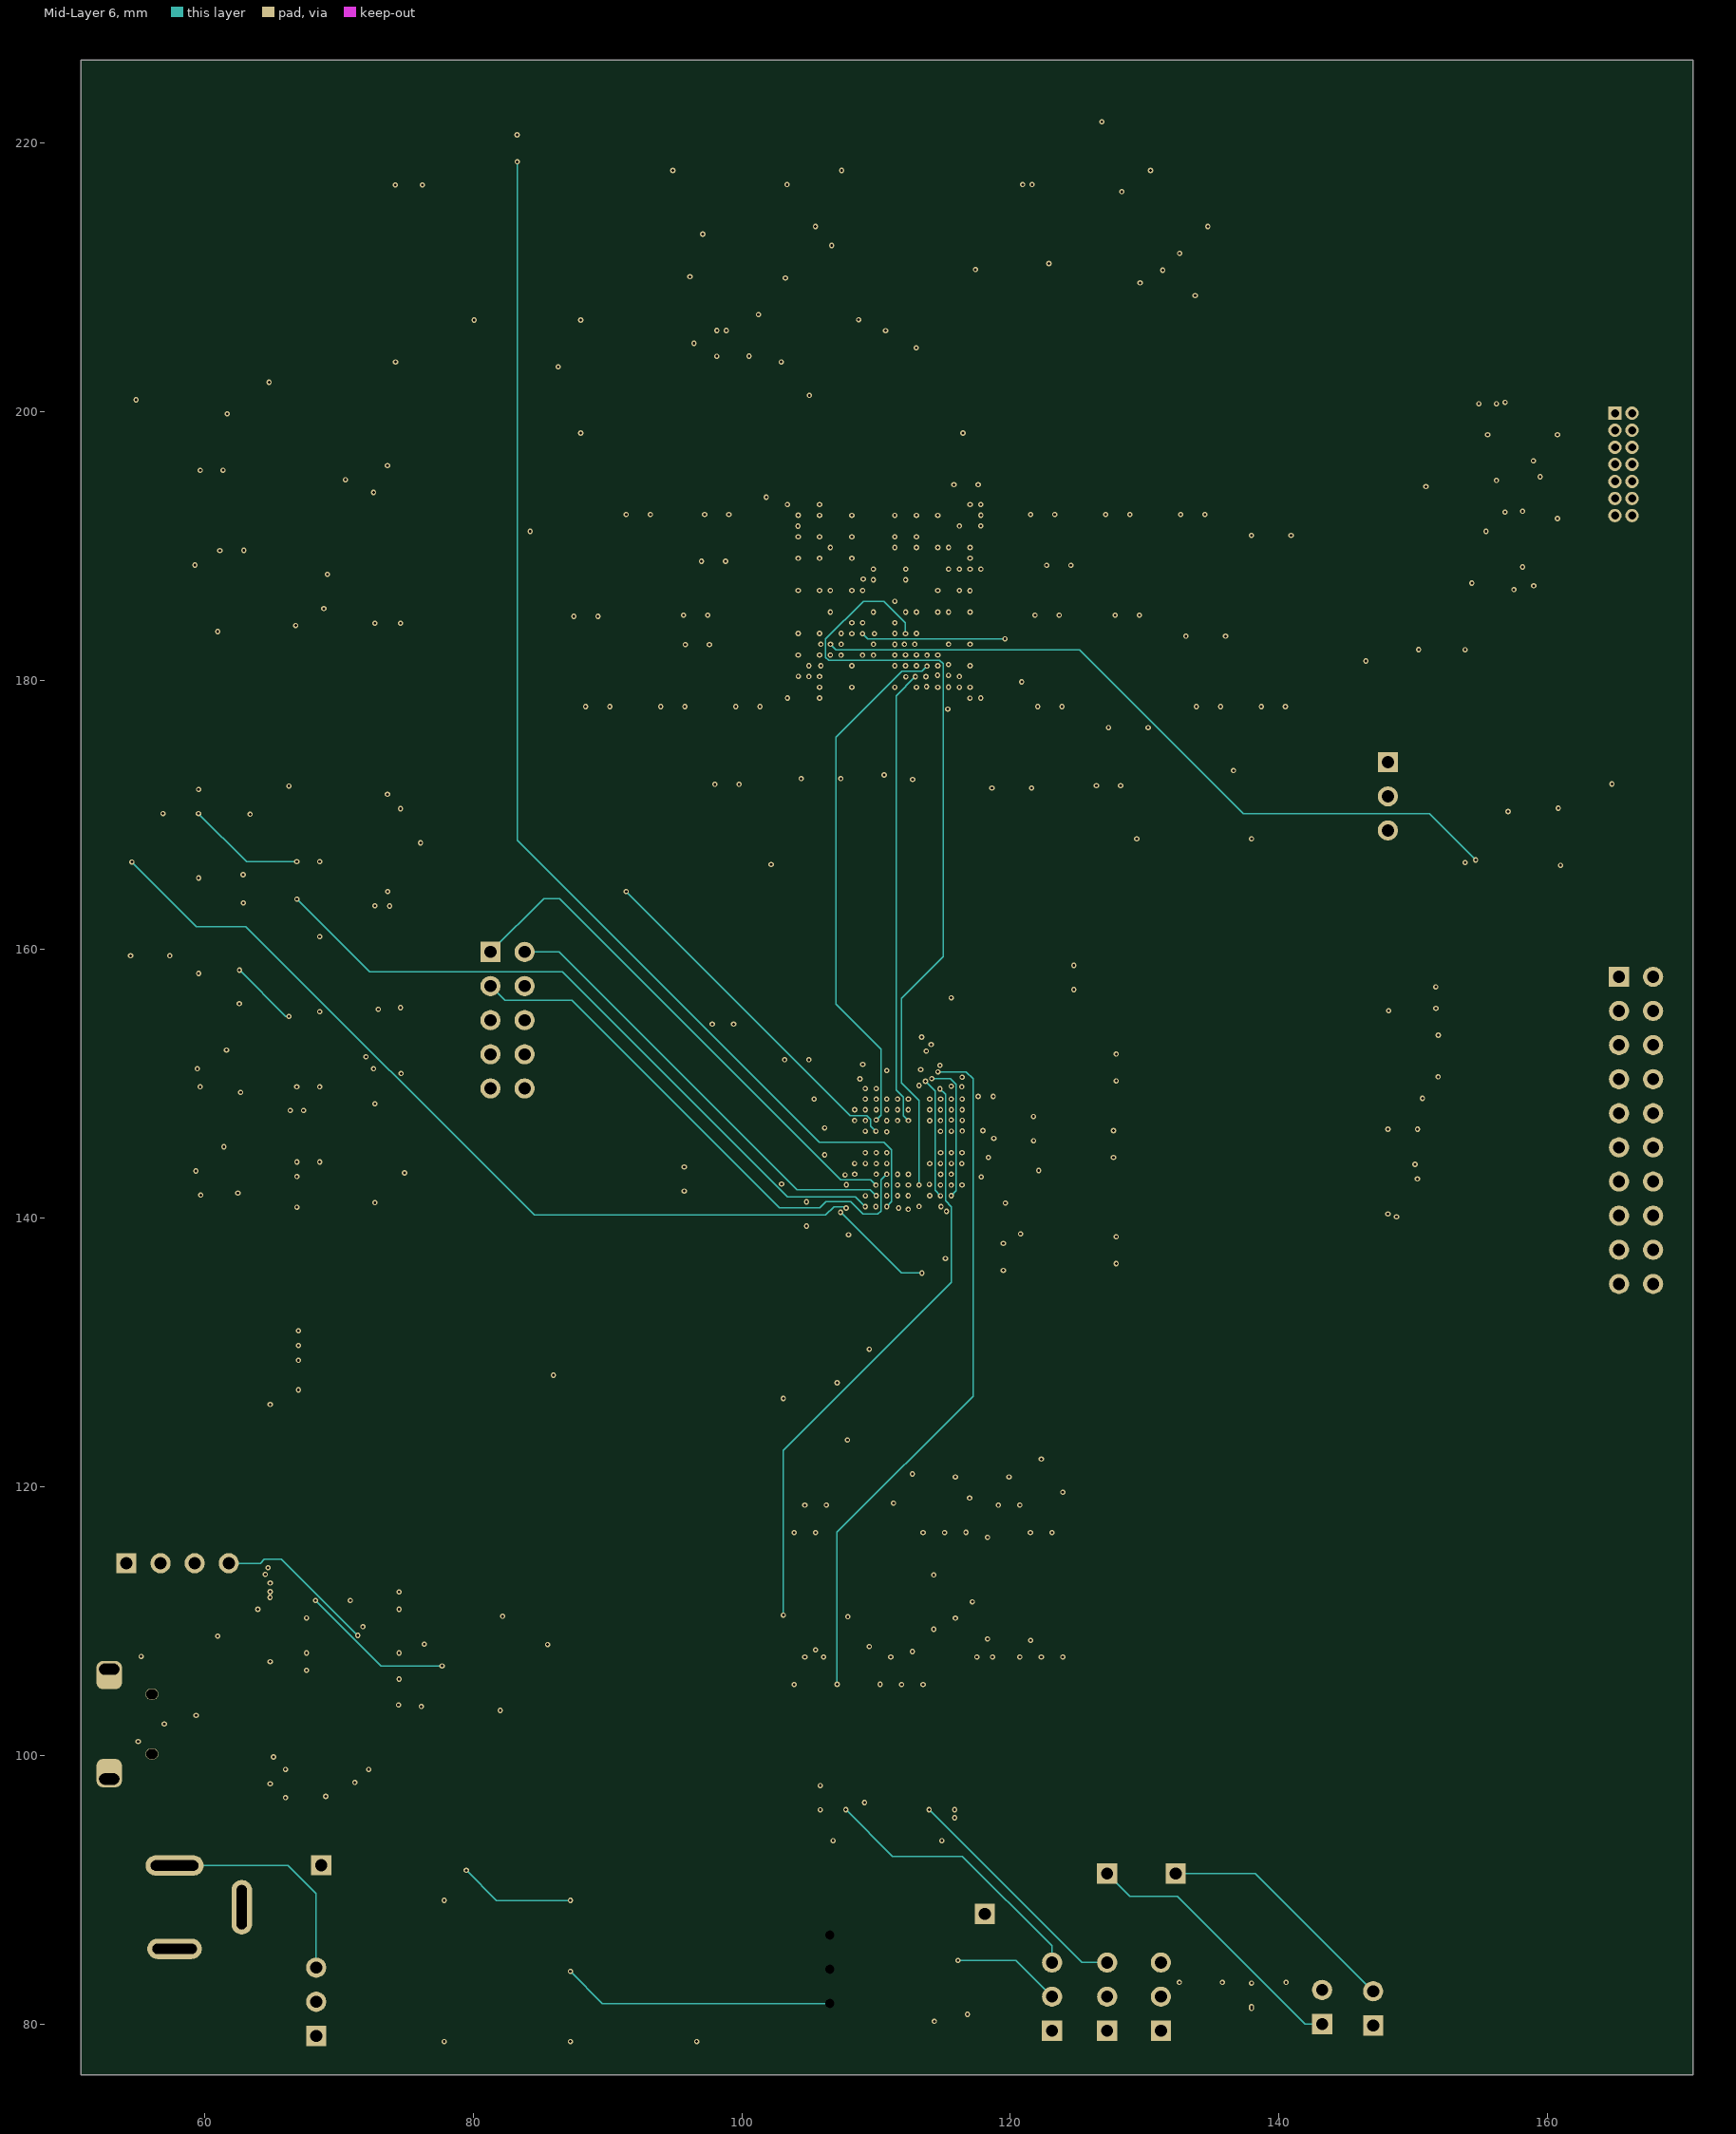
[diagram p9: Mid-Layer 6]

## Layer stack, top to bottom
Top Layer: signal copper 0.0356
Dielectric: core 0.32, FR-4, Dk 4.8
Mid-Layer 1: signal copper 0.0356
Dielectric: prepreg 0.32, FR-4, Dk 4.8
Internal Plane 1: plane copper 0.0356, net GND
Dielectric: core 0.32, FR-4, Dk 4.8
Internal Plane 2: plane copper 0.0356, net VCC33
Dielectric: prepreg 0.32, FR-4, Dk 4.8
Mid-Layer 2: signal copper 0.0356
Dielectric: core 0.32, FR-4, Dk 4.8
MidLayer3: signal copper 0.0356
Dielectric: prepreg 0.32, FR-4, Dk 4.8
Mid-Layer 4: signal copper 0.0356
Dielectric: core 0.32, FR-4, Dk 4.8
Mid-Layer 5: signal copper 0.0356
Dielectric: prepreg 0.32, FR-4, Dk 4.8
Mid-Layer 6: signal copper 0.0356
Dielectric: core 0.32, FR-4, Dk 4.8
Bottom Layer: signal copper 0.0356

## Board outline
50.8,76.2 170.8,76.2 170.8,226.2 50.8,226.2

## Design rules (kind name [scope] priority, off if disabled: settings)
Clearance "BGA clearance" [IsTrack vs not IsVia] p1: gap=0.254
Clearance [All] p2: gap=0.1
FanoutControl Fanout_BGA [IsBGA] p1: bgadir=Out bgaviamode=Centered fanoutstyle=BGA fanoutdirection=Alternating viagrid=0.025 // Fanout_BGA (Default Rule)
PlaneClearance [All] p1: clearance=0.508
PlaneConnect [All] p1: planeconnectstyle=Relief reliefexpansion=0.508 reliefentries=4 reliefconductorwidth=0.254 reliefairgap=0.254
PolygonConnect [All] p1: connectstyle=Relief reliefconductorwidth=0.254 reliefentries=4 polygonreliefangle="90 Angle" airgapwidth=0.254
RoomDefinition U_arm_power [InComponentClass('U_arm_power')] p1: confinementstyle=ConfineIn formatcopy=TRUE lockcomponents=FALSE outline 128.4,133.4 93.3,133.4 93.3,162.4 128.4,162.4
RoomDefinition U_oscillation_1 [InComponentClass('U_oscillation 1')] p2: confinementstyle=ConfineIn formatcopy=TRUE lockcomponents=FALSE outline 144.7,139.6 155,139.6 155,160.7 144.7,160.7
RoomDefinition U_fpga_power [InComponentClass('U_fpga_power')] p3: confinementstyle=ConfineIn formatcopy=TRUE lockcomponents=FALSE outline 142.467,157.539 80.225,157.539 80.225,197.199 142.467,197.199
RoomDefinition U_user_interface [InComponentClass('U_user_interface')] p4: confinementstyle=ConfineIn formatcopy=TRUE lockcomponents=FALSE outline 92.8,119.3 92.8,207.1 52.697,207.1 52.697,119.3
RoomDefinition U_uart_usb_bridge [InComponentClass('U_uart_usb_bridge')] p5: confinementstyle=ConfineIn formatcopy=TRUE lockcomponents=TRUE outline 50.742,119 50.742,95.6 86,95.6 86,119
RoomDefinition U_sram [InComponentClass('U_sram')] p6: confinementstyle=ConfineIn formatcopy=TRUE lockcomponents=FALSE outline 125.311,105.092 125.311,118.808 99.149,118.808 99.149,105.092
RoomDefinition U_power_supply [InComponentClass('U_power_supply')] p7: confinementstyle=ConfineIn formatcopy=TRUE lockcomponents=TRUE outline 52.578,77.724 149.2,77.724 149.2,100.584 52.578,100.584
RoomDefinition U_oscillation [InComponentClass('U_oscillation')] p8: confinementstyle=ConfineIn formatcopy=TRUE lockcomponents=FALSE outline 149.9,164.42 149.9,175.72 128.8,175.72 128.8,164.42
RoomDefinition U_fpga_sheet [InComponentClass('U_fpga_sheet')] p9: confinementstyle=ConfineIn formatcopy=TRUE lockcomponents=FALSE outline 101.737,177.237 119.263,177.237 119.263,197.303 101.737,197.303
RoomDefinition U_fpga_flash_debug [InComponentClass('U_fpga_flash_debug')] p10: confinementstyle=ConfineIn formatcopy=TRUE lockcomponents=FALSE outline 168.357,165.4 168.357,202.859 152.863,202.859 152.863,165.4
RoomDefinition U_audio_interface [InComponentClass('U_audio_interface')] p11: confinementstyle=ConfineIn formatcopy=TRUE lockcomponents=FALSE outline 72.813,203.035 137.147,203.035 137.147,222.026 72.813,222.026
RoomDefinition U_arm_sheet [InComponentClass('U_arm_sheet')] p12: confinementstyle=ConfineIn formatcopy=TRUE lockcomponents=FALSE outline 170,129.25 170,165.95 87.7,165.95 87.7,129.25
RoutingPriority RoutingPriority_BUSES_FIRST [(InNetClass('EBI_AD[15..0]') OR InNetClass('EBI_A[22..0]') OR InNetClass('GPIO[22..0]') OR InNetClass('GPIO_FPGA[15..0]'))] p1: routingpriority=1
RoutingPriority [All] p2: routingpriority=2
RoutingVias [All] p1: holewidth=0.2 width=0.4 viastyle="Through Hole" minholewidth=0.2 minwidth=0.35 maxholewidth=1 maxwidth=4
SolderMaskExpansion [All] p1: expansion=0.102
Width [All] p1: maxlimit=5 minlimit=0.1 preferedwidth=0.1
24 further rules are at their usual default settings.

## Classes and differential pairs
component class U_arm_power: C29 C30 C31 C32 C33 C34 C35 C36 C37 C38 C39 C40 FB2 R1
component class U_arm_sheet: C1 GG P1
component class U_audio_interface: 1 2 3 C61 C62 C63 C64 C65 C66 MJ1 MJ2 OA1 OA2 R30 R31 R32 R33 R34 R35 R36 R37 R38 R39 R40 R41 R42 R43
component class U_fpga_flash_debug: B9 C67 FPGA_FLASH P11 R44 R45 R46 R47 R48
component class U_fpga_power: C2 C3 C4 C5 C6 C7 C8 C9 C10 C11 C12 C13 C14 C15 C16 C17 C18 C19 C20 C21 C22 C23 C24 C25 C26 C27 C28
component class U_fpga_sheet: FPGA
component class U_oscillation: CG1 P2
component class U_power_supply: *1 C45 C46 C47 C48 C49 C50 FB1 J1 J2 J3 J4 L1 LED1 P3 P4 P5 P6 P7 P8 R2 R3 R4 S1 S2 U1 U2
component class U_sram: SRAM
component class U_uart_usb_bridge: B1 C51 C52 C53 FB3 LED2 LED3 P9 R5 R6 R7 R8 U3 USB1
component class U_user_interface: B2 B3 B4 B5 B6 B7 B8 C54 C55 C56 C57 C58 C59 C60 LED4 LED5 LED6 LED7 LED8 LED9 LED10 P10 R9 R10 R11 R12 R13 R14 R15 R16 R17 R18 R19 R20 R21 R22 R23 R24 R25 R26 R27 R28 R29 SD
net class CTRL_BUS[2..0]: CTRL_BUS0 CTRL_BUS1 CTRL_BUS2
net class EBI_A[22..0]: EBI_A0 EBI_A1 EBI_A2 EBI_A3 EBI_A4 EBI_A5 EBI_A6 EBI_A7 EBI_A8 EBI_A9 EBI_A10 EBI_A11 EBI_A12 EBI_A13 EBI_A14 EBI_A15 EBI_A16 EBI_A17 EBI_A18 EBI_A19 EBI_A20 EBI_A21 EBI_A22
net class EBI_AD[15..0]: EBI_AD0 EBI_AD1 EBI_AD2 EBI_AD3 EBI_AD4 EBI_AD5 EBI_AD6 EBI_AD7 EBI_AD8 EBI_AD9 EBI_AD10 EBI_AD11 EBI_AD12 EBI_AD13 EBI_AD14 EBI_AD15
net class GPIO[22..0]: GPIO0 GPIO1 GPIO2 GPIO3 GPIO4 GPIO5 GPIO6 GPIO7 GPIO8 GPIO9 GPIO10 GPIO11 GPIO12 GPIO13 GPIO14 GPIO15 GPIO16 GPIO17 GPIO18 GPIO19 GPIO20 GPIO21 GPIO22
net class GPIO_FPGA[15..0]: GPIO_FPGA0 GPIO_FPGA1 GPIO_FPGA2 GPIO_FPGA3 GPIO_FPGA4 GPIO_FPGA5 GPIO_FPGA6 GPIO_FPGA7 GPIO_FPGA8 GPIO_FPGA9 GPIO_FPGA10 GPIO_FPGA11 GPIO_FPGA12 GPIO_FPGA13 GPIO_FPGA14 GPIO_FPGA15
net class JACK_IN[1..0]: JACK_IN0 JACK_IN1
component class "U_oscillation 1": C41 C42 C43 C44 X1 X2

## Components (designator, comment, footprint, x,y, rotation, side; value= is the part's Value field where it differs from the comment)
1 "10nF" CAPC0805(2012)100_M 95.147,211.135 r0 top
2 "100nF" CAPC0805(2012)100_M 102.247,211.035 r0 top
3 "10nF" CAPC0805(2012)100_M 82.211,219.613 r90 top
*1 "DC10B" DC-10B 57.785,85.598 r90 top
B1 "BUTTON" BUTTON 77.7,104.7 r180 top
B2 "BUTTON" BUTTON 56.15,188.6 r90 top
B3 "BUTTON" BUTTON 65.15,192.6 r270 top
B4 "BUTTON" BUTTON 65.05,140.8 r270 top
B5 "BUTTON" BUTTON 65.05,148 r270 top
B6 "BUTTON" BUTTON 55.85,159.5 r90 top
B7 "BUTTON" BUTTON 55.95,166.5 r90 top
B8 "BUTTON" BUTTON 55.85,173.4 r90 top
B9 "BUTTON" BUTTON 155.2,182.3 r90 top
C1 "1uF" CAPC0805(2012)100_N 120.7,146.65 r270 bottom
C2 "4.7uF" CAPC0805(2012)145_N 97.9,189.9 r180 bottom
C3 "4.7uF" CAPC0805(2012)145_N 88.4,185.8 r180 bottom
C4 "4.7uF" CAPC0805(2012)145_N 96.7,183.7 r180 bottom
C5 "4.7uF" CAPC0805(2012)145_N 96.571,185.889 r180 bottom
C6 "4.7uF" CAPC0805(2012)145_N 139.572,179.089 r180 bottom
C7 "470nF" CAPC0805(2012)100_N 134.746,179.089 r180 bottom
C8 "100uF" CAPC1210(3225)280A_M 128.777,178.2 r180 bottom
C9 "4.7uF" CAPC0805(2012)145_N 122.935,179.089 r180 bottom
C10 "470nF" CAPC0805(2012)100_N 127.3,173.2 r180 bottom
C11 "470nF" CAPC0805(2012)100_N 111.5,174 r180 bottom
C12 "100uF" CAPC1210(3225)280A_M 105.9,174.4 r180 bottom
C13 "4.7uF" CAPC0805(2012)145_N 100.456,179.089 r180 bottom
C14 "470nF" CAPC0805(2012)100_N 94.868,179.089 r180 bottom
C15 "470nF" CAPC0805(2012)100_N 89.28,179.089 r180 bottom
C16 "100uF" CAPC1210(3225)280A_M 139.419,192.5 r180 bottom
C17 "4.7uF" CAPC0805(2012)145_N 133.577,193.389 r180 bottom
C18 "470nF" CAPC0805(2012)100_N 127.989,193.389 r180 bottom
C19 "470nF" CAPC0805(2012)100_N 122.401,193.389 r180 bottom
C20 "470nF" CAPC0805(2012)100_N 116.7,195.6 r180 bottom
C21 "100uF" CAPC1210(3225)280A_M 120.1,173.7 r180 bottom
C22 "4.7uF" CAPC0805(2012)145_N 98.9,173.3 r180 bottom
C23 "470nF" CAPC0805(2012)100_N 98.144,193.389 r180 bottom
C24 "470nF" CAPC0805(2012)100_N 92.302,193.389 r180 bottom
C25 "100uF" CAPC1210(3225)280A_M 134.544,185 r180 bottom
C26 "4.7uF" CAPC0805(2012)145_N 128.702,185.889 r180 bottom
C27 "470nF" CAPC0805(2012)100_N 122.733,185.889 r180 bottom
C28 "470nF" CAPC0805(2012)100_N 123.6,189.6 r180 bottom
C29 "10uF" CAPC0805(2012)145_N 123.7,157.9 r270 bottom
C30 "10nF" CAPC0805(2012)75_N 111.7,152.2 r0 bottom
C31 "10nF" CAPC0805(2012)75_N 104.1,152.8 r0 bottom
C32 "10nF" CAPC0805(2012)75_N 103.8,140.3 r270 bottom
C33 "10uF" CAPC0805(2012)145_N 94.7,142.9 r270 bottom
C34 "100nF" CAPC0805(2012)100_M 98.4,155.5 r0 bottom
C35 "100nF" CAPC0805(2012)100_M 126.8,151.2 r270 bottom
C36 "100nF" CAPC0805(2012)100_M 126.6,145.5 r270 bottom
C37 "100nF" CAPC0805(2012)100_M 126.8,137.6 r270 bottom
C38 "100nF" CAPC0805(2012)100_M 105.1,145.7 r270 bottom
C39 "100nF" CAPC0805(2012)100_M 120.7,141.9 r270 bottom
C40 "100nF" CAPC0805(2012)100_M 118.4,137.1 r270 bottom
C41 "22pF" CAPC0805(2012)75_L 150.7,156.4 r90 bottom
C42 "22pF" CAPC0805(2012)75_L 149.7,149.7 r90 bottom
C43 "33pF" CAPC0805(2012)75_L 149.3,145.3 r0 bottom
C44 "33pF" CAPC0805(2012)75_L 149.2,141.4 r180 bottom
C45 "1uF" CAPC0805(2012)100_N 136.8,82.2 r90 bottom
C46 "1uF" CAPC0805(2012)100_N 139.5,82.2 r270 bottom
C47 "1uF" CAPC0805(2012)100_N 133.6,82.2 r90 bottom
C48 "Cap" CAP470uF 77.851,83.947 r90 top
C49 "Cap" CAP470uF 87.249,83.947 r90 top
C50 "Cap" CAP470uF 96.647,83.947 r90 top
C51 "10nF" CAPC0805(2012)75_N 60.1,109.9 r180 bottom
C52 "100nF" CAPC0805(2012)100_M 66.1,112 r270 bottom
C53 "10nF" CAPC0805(2012)75_N 80.4,104.7 r180 bottom
C54 "10nF" CAPC0805(2012)75_N 62.05,190.7 r0 bottom
C55 "10nF" CAPC0805(2012)75_N 65.85,201.3 r270 top
C56 "10nF" CAPC0805(2012)75_N 58.35,142.6 r270 bottom
C57 "10nF" CAPC0805(2012)75_N 58.45,150.2 r270 bottom
C58 "10nF" CAPC0805(2012)75_N 58.55,157.3 r270 bottom
C59 "10nF" CAPC0805(2012)75_N 58.55,164.4 r270 bottom
C60 "10nF" CAPC0805(2012)75_N 58.55,171 r270 bottom
C61 "150pF" CAPC0805(2012)75_M 109.703,204.762 r0 top
C62 "10uF" CAPC0805(2012)145_L 78.047,210.935 r180 top
C63 "680pF" CAPC0805(2012)100_M 123.947,210.035 r90 top
C64 "150pF" CAPC0805(2012)75_M 127.804,217.962 r0 top
C65 "10uF" CAPC0805(2012)145_L 97.9,214.2 r180 top
C66 "680pF" CAPC0805(2012)100_M 75.226,217.962 r0 top
C67 "10nF" CAPC0805(2012)75_N 165.8,171.4 r270 top
CG1 "TXC-7W" TXC-7W 134.9,168.22 r90 top
FB1 "Inductor" INDC3216 114.9,86.2 r270 bottom
FB2 "BLM21B102S or similar" RESC3216N 112.2,137.1 r180 bottom
FB3 "Inductor" INDC3216 55.3,109.9 r0 bottom
FPGA "XC6SLX16-2CSG324C" CSG324 110.6,185.9 r270 top
FPGA_FLASH "TSOP65P640X119-20N" TSOP65P640X119-20N 157.8,196.6 r90 top
GG "EFM32GG990F1024-BGA112" ENMR-BGA112 112.8,145.25 r270 top
J1 "Socket" PIN1 118.1,88.2 r0 top
J2 "Socket" PIN1 127.2,91.2 r0 top
J3 "Socket" PIN1 132.3,91.2 r0 top
J4 "Socket" PIN1 68.707,91.821 r0 top
L1 "Inductor" "Coil DRA74-6R8-R" 85.5,95.6 r180 top
LED1 "Green" LED-0805-K 116.8,80.7 r90 top
LED2 "Red" LED-0805-A 64.9,97.9 r90 top
LED3 "Red" LED-0805-A 71.2,98 r90 top
LED4 "Green" LED-0805-K 73.65,185.2 r180 top
LED5 "Green" LED-0805-K 73.65,196 r180 top
LED6 "Green" LED-0805-K 73.65,142.068 r180 top
LED7 "Green" LED-0805-K 73.65,149.434 r180 top
LED8 "Green" LED-0805-K 73.65,156.8 r180 top
LED9 "Green" LED-0805-K 73.65,164.166 r180 top
LED10 "Green" LED-0805-K 73.65,171.532 r180 top
OA1 "TLV2471IDBVT" TLV2471IDBVT 98.5,205.1 r0 top
OA2 "TLV2471IDBVT" TLV2471IDBVT 131.7,209.6 r0 top
P1 "Header 10X2" HDR2X10 165.3,157.95 r270 top
P2 "Header 3" HDR1X3 148.1,173.92 r270 top
P3 "Header 2" HDR1X2 143.2,80 r90 top
P4 "Header 2" HDR1X2 147,79.9 r90 top
P5 "Header 3" HDR1X3 131.2,79.5 r90 top
P6 "Header 3" HDR1X3 127.2,79.5 r90 top
P7 "Header 3" HDR1X3 68.326,79.121 r90 top
P8 "Header 3" HDR1X3 123.1,79.5 r90 top
P9 "Header 4" HDR1X4 54.2,114.3 r0 top
P10 "Header 5X2" HDR2X5 81.3,159.8 r270 top
P11 "MHDR2X7" MHDR2X7 165,199.9 r270 top
R1 "1.00 Ohm" RESC0805(2012)_L 107,137.9 r90 bottom
R2 "10R 5% 0805(2012)" RESC0805(2012)_L 114.9,96.9 r0 bottom
R3 "330.00 Ohm" RESC0805(2012)_M 108.8,80.2 r180 bottom
R4 "10R 5% 0805(2012)" RESC0805(2012)_L 106.7,96.9 r180 bottom
R5 "330.00 Ohm" RESC0805(2012)_M 65,97.9 r90 bottom
R6 "330.00 Ohm" RESC0805(2012)_M 71.2,98 r270 bottom
R7 "100K" RESC0805(2012)_L 75.3,104.7 r180 bottom
R8 "100.00 Ohm" RESC0805(2012)_M 84.5,109.3 r270 bottom
R9 "100K" RESC0805(2012)_L 60.15,184.6 r0 bottom
R10 "100K" RESC0805(2012)_L 60.55,196.6 r180 bottom
R11 "100.00 Ohm" RESC0805(2012)_M 67.85,186.4 r0 bottom
R12 "330.00 Ohm" RESC0805(2012)_M 76.35,185.3 r0 bottom
R13 "330.00 Ohm" RESC0805(2012)_M 71.55,196 r0 bottom
R14 "100.00 Ohm" RESC0805(2012)_M 60.65,200.9 r0 bottom
R15 "100K" RESC0805(2012)_L 67.737,145.121 r0 bottom
R16 "100K" RESC0805(2012)_L 67.737,150.709 r0 bottom
R17 "100K" RESC0805(2012)_L 67.737,156.297 r0 bottom
R18 "100K" RESC0805(2012)_L 67.737,161.885 r0 bottom
R19 "100K" RESC0805(2012)_L 67.737,167.473 r0 bottom
R20 "100.00 Ohm" RESC0805(2012)_M 61.45,142.9 r270 bottom
R21 "100.00 Ohm" RESC0805(2012)_M 61.65,150.4 r270 bottom
R22 "100.00 Ohm" RESC0805(2012)_M 61.55,157.4 r270 bottom
R23 "100.00 Ohm" RESC0805(2012)_M 61.85,164.5 r270 bottom
R24 "100.00 Ohm" RESC0805(2012)_M 61.95,171.1 r270 bottom
R25 "330.00 Ohm" RESC0805(2012)_M 73.85,142.3 r180 bottom
R26 "330.00 Ohm" RESC0805(2012)_M 73.65,149.7 r180 bottom
R27 "330.00 Ohm" RESC0805(2012)_M 73.25,156.7 r180 bottom
R28 "330.00 Ohm" RESC0805(2012)_M 73.65,164.3 r0 bottom
R29 "330.00 Ohm" RESC0805(2012)_M 73.55,171.5 r180 bottom
R30 "15000.00 Ohm" RESC0805(2012)_M 115.418,204.762 r0 top
R31 "1000.00 Ohm" RESC0805(2012)_M 103.988,204.762 r0 top
R32 "1000.00 Ohm" RESC0805(2012)_M 75.286,204.762 r0 top
R33 "15000.00 Ohm" RESC0805(2012)_M 81.128,204.762 r0 top
R34 "27000.00 Ohm" RESC0805(2012)_M 86.97,204.762 r0 top
R35 "22000.00 Ohm" RESC0805(2012)_M 92.812,204.762 r0 top
R36 "47000.00 Ohm" RESC0805(2012)_M 116.347,211.635 r0 top
R37 "47000.00 Ohm" RESC0805(2012)_M 107.747,211.335 r90 top
R38 "15000.00 Ohm" RESC0805(2012)_M 133.646,217.962 r0 top
R39 "1000.00 Ohm" RESC0805(2012)_M 121.962,217.962 r0 top
R40 "1000.00 Ohm" RESC0805(2012)_M 92.879,217.962 r0 top
R41 "15000.00 Ohm" RESC0805(2012)_M 98.721,217.962 r0 top
R42 "27000.00 Ohm" RESC0805(2012)_M 104.436,217.962 r0 top
R43 "22000.00 Ohm" RESC0805(2012)_M 110.278,217.962 r0 top
R44 "4K7" RESC0805(2012)_M 160,188.1 r90 top
R45 "330.00 Ohm" RESC0805(2012)_M 155.4,188.3 r90 top
R46 "100K" RESC0805(2012)_L 154.7,167.4 r180 top
R47 "100K" RESC0805(2012)_L 161.8,167.2 r180 top
R48 "100.00 Ohm" RESC0805(2012)_M 158.1,171.3 r270 top
S1 "ZXCT1021" SOT95P270X145-5N 106.8,95.7 r90 top
S2 "ZXCT1021" SOT95P270X145-5N 114.9,95.7 r90 top
SD "MICROSD-SPI" MICROSD_WR-CRD 56.4,136.3 r90 top
SRAM "CY7C1061AV33" CY7C1061AV33 113.5,111.95 r90 top
U1 "AP7312" SOT95P285X145-6N 135.9,82.1 r0 top
U2 "SR10S3V3" SR10S3V3_Footprint 106.553,81.534 r90 top
U3 "FT232RL-Reel" SSOP-28_N 69.7,109.9 r180 top
USB1 "MICRO_USB_AB" MICRO_USB_AB 56.1,104.55 r0 top
X1 "32.768kHz" MC-306 150.6,153.6 r90 top
X2 "TXC-7B" TXC-7B 148.1,145.3 r270 top

## Footprints (in the part's own frame and the unit in brackets; to place one, negate y for a bottom-side part, rotate by r counter-clockwise, add the part's x,y. Pads: shape width x height; smd on the part's side, far side on the other; paste and mask are expansions set on the pad)
BUTTON [mm]
  rect 1.4x2.1 smd: 1(0,0) 2(0,-9.1) 3(-4.5,-9.1) 4(-4.5,0)
  silkscreen extent -5.3,-7.7 0.8,-1.3
CAP470uF [mm]
  rect 3.4x0.9 smd: 1(-3.25,0) 2(3.25,0)
  silkscreen extent -5.85,-2.5 5.73,2.5
CAPC0805(2012)75_L [mm] "Chip Capacitor, Body 2.0x1.2mm, Height 0.75mm, IPC High Density"
  rect 0.95x1.35 smd: 1(-0.8,0) 2(0.8,0)
  silkscreen extent -0.05,-0.58 0.05,0.57, body extent -1.1,-0.72 1.1,0.72, height 0.75
CAPC0805(2012)75_M [mm] "Chip Capacitor, Body 2.0x1.2mm, Height 0.75mm, IPC Low Density"
  rect 1.35x1.55 smd: 1(-1,0) 2(1,0)
  silkscreen extent -0.05,-0.68 0.05,0.68, body extent -1.1,-0.72 1.1,0.72, height 0.75
CAPC0805(2012)75_N [mm] "Chip Capacitor, Body 2.0x1.2mm, Height 0.75mm, IPC Medium Density"
  rect 1.15x1.45 smd: 1(-0.9,0) 2(0.9,0)
  silkscreen extent -0.05,-0.62 0.05,0.62, body extent -1.1,-0.72 1.1,0.73, height 0.75
CAPC0805(2012)100_M [mm] "Chip Capacitor, Body 2.0x1.2mm, Height 1.0mm, IPC Low Density"
  rect 1.35x1.55 smd: 1(-1,0) 2(1,0)
  silkscreen extent -0.05,-0.67 0.05,0.68, body extent -1.1,-0.72 1.1,0.72, height 1
CAPC0805(2012)100_N [mm] "Chip Capacitor, Body 2.0x1.2mm, Height 1.0mm, IPC Medium Density"
  rect 1.15x1.45 smd: 1(-0.9,0) 2(0.9,0)
  silkscreen extent -0.05,-0.63 0.05,0.62, body extent -1.1,-0.72 1.1,0.73, height 1
CAPC0805(2012)145_L [mm] "Chip Capacitor, Body 2.0x1.2mm, Height 1.45mm, IPC High Density"
  rect 0.95x1.35 smd: 1(-0.8,0) 2(0.8,0)
  silkscreen extent -0.05,-0.58 0.05,0.57, body extent -1.1,-0.72 1.1,0.72, height 1.45
CAPC0805(2012)145_N [mm] "Chip Capacitor, Body 2.0x1.2mm, Height 1.45mm, IPC Medium Density"
  rect 1.15x1.45 smd: 1(-0.9,0) 2(0.9,0)
  silkscreen extent -0.05,-0.62 0.05,0.62, body extent -1.1,-0.72 1.1,0.73, height 1.45
CAPC1210(3225)280A_M [mm] "Chip Capacitor, Body 3.2x2.5mm, Height 2.8mm, IPC Low Density"
  rect 1.6x2.8 smd: 1(-1.475,0) 2(1.475,0)
  silkscreen extent -0.3,-1.3 0.3,1.3, body extent -1.7,-1.4 1.7,1.4, height 2.8
"Coil DRA74-6R8-R" [mm]
  rect 2.5x3.25 smd: 1(0,0) 2(6,0)
  silkscreen extent -2,-2.5 8,2
CSG324 [mm] "BGA, 324-Leads, Body 15x15mm, Pitch 0.8mm"
  round 0.36 smd: A1(-6.8,6.8) A2(-6,6.8) A3(-5.2,6.8) A4(-4.4,6.8) A5(-3.6,6.8) A6(-2.8,6.8) A7(-2,6.8) A8(-1.2,6.8) A9(-0.4,6.8) A10(0.4,6.8) A11(1.2,6.8) A12(2,6.8) A13(2.8,6.8) A14(3.6,6.8) A15(4.4,6.8) A16(5.2,6.8) A17(6,6.8) A18(6.8,6.8) B1(-6.8,6) B2(-6,6) B3(-5.2,6) B4(-4.4,6) B5(-3.6,6) B6(-2.8,6) B7(-2,6) B8(-1.2,6) B9(-0.4,6) B10(0.4,6) B11(1.2,6) B12(2,6) B13(2.8,6) B14(3.6,6) B15(4.4,6) B16(5.2,6) B17(6,6) B18(6.8,6) C1(-6.8,5.2) C2(-6,5.2) C3(-5.2,5.2) C4(-4.4,5.2) C5(-3.6,5.2) C6(-2.8,5.2) C7(-2,5.2) C8(-1.2,5.2) C9(-0.4,5.2) C10(0.4,5.2) C11(1.2,5.2) C12(2,5.2) C13(2.8,5.2) C14(3.6,5.2) C15(4.4,5.2) C16(5.2,5.2) C17(6,5.2) C18(6.8,5.2) D1(-6.8,4.4) D2(-6,4.4) D3(-5.2,4.4) D4(-4.4,4.4) D5(-3.6,4.4) D6(-2.8,4.4) D7(-2,4.4) D8(-1.2,4.4) D9(-0.4,4.4) D10(0.4,4.4) D11(1.2,4.4) D12(2,4.4) D13(2.8,4.4) D14(3.6,4.4) D15(4.4,4.4) D16(5.2,4.4) D17(6,4.4) D18(6.8,4.4) E1(-6.8,3.6) E2(-6,3.6) E3(-5.2,3.6) E4(-4.4,3.6) E5(-3.6,3.6) E6(-2.8,3.6) E7(-2,3.6) E8(-1.2,3.6) E9(-0.4,3.6) E10(0.4,3.6) E11(1.2,3.6) E12(2,3.6) E13(2.8,3.6) E14(3.6,3.6) E15(4.4,3.6) E16(5.2,3.6) E17(6,3.6) E18(6.8,3.6) F1(-6.8,2.8) F2(-6,2.8) F3(-5.2,2.8) F4(-4.4,2.8) F5(-3.6,2.8) F6(-2.8,2.8) F7(-2,2.8) F8(-1.2,2.8) F9(-0.4,2.8) F10(0.4,2.8) F11(1.2,2.8) F12(2,2.8) F13(2.8,2.8) F14(3.6,2.8) F15(4.4,2.8) F16(5.2,2.8) F17(6,2.8) F18(6.8,2.8) G1(-6.8,2) G2(-6,2) G3(-5.2,2) G4(-4.4,2) G5(-3.6,2) G6(-2.8,2) G7(-2,2) G8(-1.2,2) G9(-0.4,2) G10(0.4,2) G11(1.2,2) G12(2,2) G13(2.8,2) G14(3.6,2) G15(4.4,2) G16(5.2,2) G17(6,2) G18(6.8,2) H1(-6.8,1.2) H2(-6,1.2) H3(-5.2,1.2) H4(-4.4,1.2) H5(-3.6,1.2) H6(-2.8,1.2) H7(-2,1.2) H8(-1.2,1.2) H9(-0.4,1.2) H10(0.4,1.2) H11(1.2,1.2) H12(2,1.2) H13(2.8,1.2) H14(3.6,1.2) H15(4.4,1.2) H16(5.2,1.2) H17(6,1.2) H18(6.8,1.2) J1(-6.8,0.4) J2(-6,0.4) J3(-5.2,0.4) J4(-4.4,0.4) J5(-3.6,0.4) J6(-2.8,0.4) J7(-2,0.4) J8(-1.2,0.4) J9(-0.4,0.4) J10(0.4,0.4) J11(1.2,0.4) J12(2,0.4) J13(2.8,0.4) J14(3.6,0.4) J15(4.4,0.4) J16(5.2,0.4) J17(6,0.4) J18(6.8,0.4) K1(-6.8,-0.4) K2(-6,-0.4) K3(-5.2,-0.4) K4(-4.4,-0.4) K5(-3.6,-0.4) K6(-2.8,-0.4) K7(-2,-0.4) K8(-1.2,-0.4) K9(-0.4,-0.4) K10(0.4,-0.4) K11(1.2,-0.4) K12(2,-0.4) K13(2.8,-0.4) K14(3.6,-0.4) K15(4.4,-0.4) K16(5.2,-0.4) K17(6,-0.4) K18(6.8,-0.4) L1(-6.8,-1.2) L2(-6,-1.2) L3(-5.2,-1.2) L4(-4.4,-1.2) L5(-3.6,-1.2) L6(-2.8,-1.2) L7(-2,-1.2) L8(-1.2,-1.2) L9(-0.4,-1.2) L10(0.4,-1.2) L11(1.2,-1.2) L12(2,-1.2) L13(2.8,-1.2) L14(3.6,-1.2) L15(4.4,-1.2) L16(5.2,-1.2) L17(6,-1.2) L18(6.8,-1.2) M1(-6.8,-2) M2(-6,-2) M3(-5.2,-2) M4(-4.4,-2) M5(-3.6,-2) M6(-2.8,-2) M7(-2,-2) M8(-1.2,-2) M9(-0.4,-2) M10(0.4,-2) M11(1.2,-2) M12(2,-2) M13(2.8,-2) M14(3.6,-2) M15(4.4,-2) M16(5.2,-2) M17(6,-2) M18(6.8,-2) N1(-6.8,-2.8) N2(-6,-2.8) N3(-5.2,-2.8) N4(-4.4,-2.8) N5(-3.6,-2.8) N6(-2.8,-2.8) N7(-2,-2.8) N8(-1.2,-2.8) N9(-0.4,-2.8) N10(0.4,-2.8) N11(1.2,-2.8) N12(2,-2.8) N13(2.8,-2.8) N14(3.6,-2.8) N15(4.4,-2.8) N16(5.2,-2.8) N17(6,-2.8) N18(6.8,-2.8) P1(-6.8,-3.6) P2(-6,-3.6) P3(-5.2,-3.6) P4(-4.4,-3.6) P5(-3.6,-3.6) P6(-2.8,-3.6) P7(-2,-3.6) P8(-1.2,-3.6) P9(-0.4,-3.6) P10(0.4,-3.6) P11(1.2,-3.6) P12(2,-3.6) P13(2.8,-3.6) P14(3.6,-3.6) P15(4.4,-3.6) P16(5.2,-3.6) P17(6,-3.6) P18(6.8,-3.6) R1(-6.8,-4.4) R2(-6,-4.4) R3(-5.2,-4.4) R4(-4.4,-4.4) R5(-3.6,-4.4) R6(-2.8,-4.4) R7(-2,-4.4) R8(-1.2,-4.4) R9(-0.4,-4.4) R10(0.4,-4.4) R11(1.2,-4.4) R12(2,-4.4) R13(2.8,-4.4) R14(3.6,-4.4) R15(4.4,-4.4) R16(5.2,-4.4) R17(6,-4.4) R18(6.8,-4.4) T1(-6.8,-5.2) T2(-6,-5.2) T3(-5.2,-5.2) T4(-4.4,-5.2) T5(-3.6,-5.2) T6(-2.8,-5.2) T7(-2,-5.2) T8(-1.2,-5.2) T9(-0.4,-5.2) T10(0.4,-5.2) T11(1.2,-5.2) T12(2,-5.2) T13(2.8,-5.2) T14(3.6,-5.2) T15(4.4,-5.2) T16(5.2,-5.2) T17(6,-5.2) T18(6.8,-5.2) U1(-6.8,-6) U2(-6,-6) U3(-5.2,-6) U4(-4.4,-6) U5(-3.6,-6) U6(-2.8,-6) U7(-2,-6) U8(-1.2,-6) U9(-0.4,-6) U10(0.4,-6) U11(1.2,-6) U12(2,-6) U13(2.8,-6) U14(3.6,-6) U15(4.4,-6) U16(5.2,-6) U17(6,-6) U18(6.8,-6) V1(-6.8,-6.8) V2(-6,-6.8) V3(-5.2,-6.8) V4(-4.4,-6.8) V5(-3.6,-6.8) V6(-2.8,-6.8) V7(-2,-6.8) V8(-1.2,-6.8) V9(-0.4,-6.8) V10(0.4,-6.8) V11(1.2,-6.8) V12(2,-6.8) V13(2.8,-6.8) V14(3.6,-6.8) V15(4.4,-6.8) V16(5.2,-6.8) V17(6,-6.8) V18(6.8,-6.8)
  silkscreen extent -8.27,-7.5 7.5,7.5, body extent -7.5,-7.5 7.5,7.5, height 1.5
CY7C1061AV33 [mm] "TSOP, 54-Leads, Body 22,41x10,16mm, Pitch 0,80mm, IPC Medium Density"
  oval 1.45x0.5 smd: 1(-5.65,10.4) 2(-5.65,9.6) 3(-5.65,8.8) 4(-5.65,8) 5(-5.65,7.2) 6(-5.65,6.4) 7(-5.65,5.6) 8(-5.65,4.8) 9(-5.65,4) 10(-5.65,3.2) 11(-5.65,2.4) 12(-5.65,1.6) 13(-5.65,0.8) 14(-5.65,0) 15(-5.65,-0.8) 16(-5.65,-1.6) 17(-5.65,-2.4) 18(-5.65,-3.2) 19(-5.65,-4) 20(-5.65,-4.8) 21(-5.65,-5.6) 22(-5.65,-6.4) 23(-5.65,-7.2) 24(-5.65,-8) 25(-5.65,-8.8) 26(-5.65,-9.6) 27(-5.65,-10.4) 28(5.65,-10.4) 29(5.65,-9.6) 30(5.65,-8.8) 31(5.65,-8) 32(5.65,-7.2) 33(5.65,-6.4) 34(5.65,-5.6) 35(5.65,-4.8) 36(5.65,-4) 37(5.65,-3.2) 38(5.65,-2.4) 39(5.65,-1.6) 40(5.65,-0.8) 41(5.65,0) 42(5.65,0.8) 43(5.65,1.6) 44(5.65,2.4) 45(5.65,3.2) 46(5.65,4) 47(5.65,4.8) 48(5.65,5.6) 49(5.65,6.4) 50(5.65,7.2) 51(5.65,8) 52(5.65,8.8) 53(5.65,9.6) 54(5.65,10.4)
  silkscreen extent -5.77,-11.25 4.53,11.32, body extent -5.15,-11.25 5.15,11.25, height 1.2
DC-10B [mil]
  oval 60x170 hole 30 slot 140 at 90 deg: 1(244.09,0)
  oval 160x60 hole 30 slot 130 at 0 deg: 2(122.05,-196.85)
  oval 60x160 hole 30 slot 130 at 90 deg: 3(0,0)
  silkscreen extent -295,-200 245,197
ENMR-BGA112 [mm] "BGA, 112-Balls, Body 10x10mm, Pitch 0.8mm"
  round 0.45 smd: A1(-4,4) A2(-3.2,4) A3(-2.4,4) A4(-1.6,4) A5(-0.8,4) A6(0,4) A7(0.8,4) A8(1.6,4) A9(2.4,4) A10(3.2,4) A11(4,4) B1(-4,3.2) B2(-3.2,3.2) B3(-2.4,3.2) B4(-1.6,3.2) B5(-0.8,3.2) B6(0,3.2) B7(0.8,3.2) B8(1.6,3.2) B9(2.4,3.2) B10(3.2,3.2) B11(4,3.2) C1(-4,2.4) C2(-3.2,2.4) C3(-2.4,2.4) C4(-1.6,2.4) C5(-0.8,2.4) C6(0,2.4) C7(0.8,2.4) C8(1.6,2.4) C9(2.4,2.4) C10(3.2,2.4) C11(4,2.4) D1(-4,1.6) D2(-3.2,1.6) D3(-2.4,1.6) D4(-1.6,1.6) D5(-0.8,1.6) D6(0,1.6) D7(0.8,1.6) D8(1.6,1.6) D9(2.4,1.6) D10(3.2,1.6) D11(4,1.6) E1(-4,0.8) E2(-3.2,0.8) E3(-2.4,0.8) E4(-1.6,0.8) E5(-0.8,0.8) E6(0,0.8) E7(0.8,0.8) E8(1.6,0.8) E9(2.4,0.8) E10(3.2,0.8) E11(4,0.8) F1(-4,0) F2(-3.2,0) F3(-2.4,0) F4(-1.6,0) F5(-0.8,0) F6(0,0) F7(0.8,0) F8(1.6,0) F9(2.4,0) F10(3.2,0) F11(4,0) G1(-4,-0.8) G2(-3.2,-0.8) G3(-2.4,-0.8) G4(-1.6,-0.8) G5(-0.8,-0.8) G6(0,-0.8) G7(0.8,-0.8) G8(1.6,-0.8) G9(2.4,-0.8) G10(3.2,-0.8) G11(4,-0.8) H1(-4,-1.6) H2(-3.2,-1.6) H3(-2.4,-1.6) H4(-1.6,-1.6) H5(-0.8,-1.6) H6(0,-1.6) H7(0.8,-1.6) H8(1.6,-1.6) H9(2.4,-1.6) H10(3.2,-1.6) H11(4,-1.6) J1(-4,-2.4) J2(-3.2,-2.4) J3(-2.4,-2.4) J4(-1.6,-2.4) J5(-0.8,-2.4) J6(0,-2.4) J7(0.8,-2.4) J8(1.6,-2.4) J9(2.4,-2.4) J10(3.2,-2.4) J11(4,-2.4) K1(-4,-3.2) K2(-3.2,-3.2) K3(-2.4,-3.2) K4(-1.6,-3.2) K5(-0.8,-3.2) K6(0,-3.2) K7(0.8,-3.2) K8(1.6,-3.2) K9(2.4,-3.2) K10(3.2,-3.2) K11(4,-3.2) L1(-4,-4) L2(-3.2,-4) L3(-2.4,-4) L4(-1.6,-4) L5(-0.8,-4) L6(0,-4) L7(0.8,-4) L8(1.6,-4) L9(2.4,-4) L10(3.2,-4) L11(4,-4)
  silkscreen extent -5.77,-5 5,5, body extent -5,-5 5,5, height 1.3
HDR1X2 [mm] "Connector; Header; 2 Position"
  rect 1.5x1.5 hole 0.9: 1(0,0)
  round 1.5 hole 0.9: 2(2.54,0)
  silkscreen extent -1.27,-1.27 3.81,1.27
HDR1X3 [mm] "Connector; Header; 3 Position"
  rect 1.5x1.5 hole 0.9: 1(0,0)
  round 1.5 hole 0.9: 2(2.54,0) 3(5.08,0)
  silkscreen extent -1.27,-1.27 6.35,1.27
HDR1X4 [mm] "Connector; Header; 4 Position"
  rect 1.5x1.5 hole 0.9: 1(0,0)
  round 1.5 hole 0.9: 2(2.54,0) 3(5.08,0) 4(7.62,0)
  silkscreen extent -1.27,-1.27 8.89,1.27
HDR2X5 [mm] "Connector; Header; 5x2 Position"
  rect 1.5x1.5 hole 0.9: 1(0,0)
  round 1.5 hole 0.9: 2(0,2.54) 3(2.54,0) 4(2.54,2.54) 5(5.08,0) 6(5.08,2.54) 7(7.62,0) 8(7.62,2.54) 9(10.16,0) 10(10.16,2.54)
  silkscreen extent -1.27,-1.27 11.43,3.81
HDR2X10 [mm] "Connector; Header; 10x2 Position"
  rect 1.5x1.5 hole 0.9: 1(0,0)
  round 1.5 hole 0.9: 2(0,2.54) 3(2.54,0) 4(2.54,2.54) 5(5.08,0) 6(5.08,2.54) 7(7.62,0) 8(7.62,2.54) 9(10.16,0) 10(10.16,2.54) 11(12.7,0) 12(12.7,2.54) 13(15.24,0) 14(15.24,2.54) 15(17.78,0) 16(17.78,2.54) 17(20.32,0) 18(20.32,2.54) 19(22.86,0) 20(22.86,2.54)
  silkscreen extent -1.27,-1.27 24.13,3.81
INDC3216 [mm] "Chip Inductor, Body 3.2x1.6mm, IPC High Density"
  rect 1.1x1.8 smd: 1(-1.35,0) 2(1.35,0)
  silkscreen extent -0.4,-0.8 0.4,0.8, body extent -1.7,-0.9 1.7,0.9, height 0.55
LED-0805-A [mil]
  round 20 on Mech14: 0(0,0)
  rrect25% 50x50 smd: A(-37.5,0) K(37.5,0)
  Top Layer pour cut-out: -15,30 15,30 15,-30 -15,-30
  silkscreen extent -73,-35 77,35, body extent -39,-25 39,25, height 31
LED-0805-K [mil]
  round 20 on Mech14: 0(0,0)
  rrect25% 50x50 smd: A(-37.5,0) K(37.5,0)
  Top Layer pour cut-out: -15,30 15,30 15,-30 -15,-30
  silkscreen extent -72,-35 77,35, body extent -39,-25 39,25, height 31
MC-306 [mm]
  rect 1.3x1.9 smd: 1(0,0) 2(5.5,0) 3(5.5,3.2) 4(0,3.2)
  silkscreen extent -0.92,-1.27 6.46,4.41
MHDR2X7 [mm] "Connector; Header; 7x2 Position"
  rect 1x1 hole 0.6: 1(0,0)
  round 1 hole 0.6: 2(0,1.27) 3(1.27,0) 4(1.27,1.27) 5(2.54,0) 6(2.54,1.27) 7(3.81,0) 8(3.81,1.27) 9(5.08,0) 10(5.08,1.27) 11(6.35,0) 12(6.35,1.27) 13(7.62,0) 14(7.62,1.27)
  silkscreen extent -0.9,-0.9 8.52,2.17
MICRO_USB_AB [mm] "Molex, Micro USB type AB 47589-0001"
  rect 1.35x0.4 smd: 1(-0.05,-0.925) 2(-0.05,-1.575) 3(-0.05,-2.225) 4(-0.05,-2.875) 5(-0.05,-3.525)
  rrect50% 1.9x2.1 hole 0.83 slot 1.5 at 0 deg unplated copper offset 0,0.435: ""(-3.18,-6.31)
  rrect50% 1.9x2.1 hole 0.83 slot 1.5 at 0 deg unplated copper offset 0,-0.435: ""(-3.18,1.86)
  rect 1.9x1.8 smd: ""(-3,-3.375) ""(-3,-1.075)
  oval 0.95x0.85 hole 0.75 slot 0.85 at 0 deg unplated: ""(0,-4.45) ""(0,0)
  silkscreen extent -4.98,-8.55 2,3.62
MICROSD_WR-CRD [mm] "Micro SD from Würth Electronics, WR-CRD"
  rect 0.8x1.5 smd: 1(-3.6,-9.55) 2(-4.7,-9.55) 3(-5.8,-9.55) 4(-6.9,-9.55) 5(-8,-9.55) 6(-9.1,-9.55) 7(-10.2,-9.55) 8(-11.3,-9.55)
  rect 1.45x2 smd: ""(-13.75,-12.15) ""(-13.75,-3.85) ""(0,-3.85) ""(0,-12.15)
  silkscreen extent -16.3,-14.7 2.05,3.45
PIN1 [mm] "Connector; Plug"
  rect 1.5x1.5 hole 0.9: 1(0,0)
  silkscreen extent -1.4,-1.4 1.4,2.17
RESC0805(2012)_L [mm] "Chip Resistor, Body 2.0x1.3mm, IPC High Density"
  rect 0.85x1.3 smd: 1(-0.85,0) 2(0.85,0)
  silkscreen extent -0.05,-0.55 0.05,0.55, body extent -1.1,-0.67 1.1,0.68, height 0.7
RESC0805(2012)_M [mm] "Chip Resistor, Body 2.0x1.3mm, IPC Low Density"
  rect 1.25x1.5 smd: 1(-1.05,0) 2(1.05,0)
  silkscreen extent -0.05,-0.65 0.05,0.65, body extent -1.1,-0.67 1.1,0.67, height 0.7
RESC3216N [mm] "Chip Resistor, Body 3.2x1.6mm, 1206, IPC Medium Density"
  round 0.508 on Mech14: 0(0,0)
  rrect25% 1.3x1.8 smd: 1(-1.45,0) 2(1.45,0)
  silkscreen extent -0.51,-0.89 0.51,0.89, body extent -1.62,-0.82 1.63,0.83, height 0.69
SOT95P270X145-5N [mm] "SOT23, 5-Leads, Body 2,90x2,70mm, Pitch 0,95mm, IPC Medium Density"
  rect 1.1x0.6 smd: 1(-1.2,0.95) 2(-1.2,0) 3(-1.2,-0.95) 4(1.2,-0.95) 5(1.2,0.95)
  silkscreen extent -1.32,-1.55 0.25,1.92, body extent -0.9,-1.55 0.9,1.55, height 1.45
SOT95P285X145-6N [mm] "SOT23, 6-Leads, Body 3,00x2,85mm, Pitch 0,95mm, IPC Medium Density"
  rect 1.05x0.6 smd: 1(-1.225,0.95) 2(-1.225,0) 3(-1.225,-0.95) 4(1.225,-0.95) 5(1.225,0) 6(1.225,0.95)
  silkscreen extent -1.35,-1.55 0.3,1.92, body extent -0.85,-1.55 0.85,1.55, height 1.45
SR10S3V3_Footprint [mm]
  rect 0.5x0.25 hole 0.7: 1(0,0) 2(2.54,0) 3(5.08,0)
  silkscreen extent -3.5,-6.06 8.21,2.01
SSOP-28_N [mm] "SOP, 28-Leads, Body 10.2x5.3mm, Pitch 0.65mm, IPC Medium Density"
  oval 2.1x0.35 smd: 1(-3.45,4.225) 2(-3.45,3.575) 3(-3.45,2.925) 4(-3.45,2.275) 5(-3.45,1.625) 6(-3.45,0.975) 7(-3.45,0.325) 8(-3.45,-0.325) 9(-3.45,-0.975) 10(-3.45,-1.625) 11(-3.45,-2.275) 12(-3.45,-2.925) 13(-3.45,-3.575) 14(-3.45,-4.225) 15(3.45,-4.225) 16(3.45,-3.575) 17(3.45,-2.925) 18(3.45,-2.275) 19(3.45,-1.625) 20(3.45,-0.975) 21(3.45,-0.325) 22(3.45,0.325) 23(3.45,0.975) 24(3.45,1.625) 25(3.45,2.275) 26(3.45,2.925) 27(3.45,3.575) 28(3.45,4.225)
  silkscreen extent -3.57,-5.25 2,5.25, body extent -2.8,-5.25 2.8,5.25, height 2
TLV2471IDBVT [mm] "SOT23, 5-Leads, Body 2,90x2,80mm, Pitch 0,95mm, IPC Medium Density"
  rect 1.1x0.6 smd: 1(-1.2,0.95) 2(-1.2,0) 3(-1.2,-0.95) 4(1.2,-0.95) 5(1.2,0.95)
  silkscreen extent -1.32,-1.55 0.25,1.92, body extent -0.87,-1.52 0.87,1.53, height 1.45
TSOP65P640X119-20N [mm] "TSOP, 20-Leads, Body 6,50x4,38mm, Pitch 0,65mm, IPC Medium Density"
  rect 1.7x0.35 smd: 1(-2.85,2.925) 2(-2.85,2.275) 3(-2.85,1.625) 4(-2.85,0.975) 5(-2.85,0.325) 6(-2.85,-0.325) 7(-2.85,-0.975) 8(-2.85,-1.625) 9(-2.85,-2.275) 10(-2.85,-2.925) 11(2.85,-2.925) 12(2.85,-2.275) 13(2.85,-1.625) 14(2.85,-0.975) 15(2.85,-0.325) 16(2.85,0.325) 17(2.85,0.975) 18(2.85,1.625) 19(2.85,2.275) 20(2.85,2.925)
  silkscreen extent -2.97,-3.3 1.6,3.77, body extent -2.25,-3.3 2.25,3.3, height 1.19
TXC-7B [mm]
  rect 2x1.2 smd: 1(0,0) 2(3.7,0) 3(3.7,2.2) 4(0,2.2)
  silkscreen extent -1.28,-0.87 4.98,3.09
TXC-7W [mm]
  rect 1.8x2 smd: 1(0,0) 2(5.08,0) 3(5.08,4.2) 4(0,4.2)
  silkscreen extent -1.22,-1.37 6.3,5.57

## Part data
1 3: library part CMP-1036-03801-1, "CAP 10nF 6.3V ±5% 0805 (2012 Metric) Thickness 1mm SMD"
2: library part CMP-1036-04390-1, "CAP 100nF 6.3V ±5% 0805 (2012 Metric) Thickness 1mm SMD"
C1 C45 C46 C47: library part CMP-1036-04747-1, "CAP 1uF 16V ±10% 0805 (2012 Metric) Thickness 1mm SMD"
C2 C3 C4 C5 C6 C9 C13 C17 C22 C26: library part CMP-1036-04881-1, "CAP 4.7uF 10V ±10% 0805 (2012 Metric) Thickness 1.45mm SMD"
C7 C10 C11 C14 C15 C18 C19 C20 C23 C24 C27 C28: library part CMP-1036-04639-1, "CAP 470nF 16V ±10% 0805 (2012 Metric) Thickness 1mm SMD"
C8 C12 C16 C21 C25: library part CMP-1038-02303-1, "CAP 100uF 6.3V ±20% 1210 (3225 Metric) Thickness 2.8mm SMD"
C29 C33: library part CMP-1036-04932-1, "CAP 10uF 25V ±10% 0805 (2012 Metric) Thickness 1.45mm SMD"
C30 C31 C32 C51 C53 C54 C55 C56 C57 C58 C59 C60 C67: library part CMP-1036-03842-1, "CAP 10nF 50V ±10% 0805 (2012 Metric) Thickness 0.75mm SMD"
C34 C35 C36 C37 C38 C39 C40 C52: library part CMP-1036-04420-1, "CAP 100nF 50V ±10% 0805 (2012 Metric) Thickness 1mm SMD"
C41 C42: library part CMP-1036-01219-1, "CAP 22pF 16V ±5% 0805 (2012 Metric) Thickness 0.75mm SMD"
C43 C44: library part CMP-1036-01407-1, "CAP 33pF 16V ±5% 0805 (2012 Metric) Thickness 0.75mm SMD"
C48 C49 C50: "Capacitor"
C61 C64: library part CMP-1036-02142-1, "CAP 150pF 100V ±1% 0805 (2012 Metric) Thickness 0.75mm SMD"
C62 C65: library part CMP-1036-04915-1, "CAP 10uF 6.3V ±10% 0805 (2012 Metric) Thickness 1.45mm SMD"
C63 C66: library part CMP-1036-02797-1, "CAP 680pF 6.3V ±5% 0805 (2012 Metric) Thickness 1mm SMD"
FB2: library part Inductor, "Inductor"
FPGA: "Spartan-6 LX 1.2V FPGA, 232 User I/Os, 324-Ball Chip-Scale BGA (0.8mm Pitch), Speed Grade 2, Commercial Grade, Pb-Free"
GG: "EFM32 Giant Gecko, M3 ARM Cortex CPU, 1024 KB Flash, 128 KB RAM, 1.85 - 3.8 V Supply, 48 MHz Max Speed, -40 to 85 degC, 112-Pin BGA, RoHS Compliant"
LED1 LED4 LED5 LED6 LED7 LED8 LED9 LED10: library part LED_SMD_Green_0805, "LED, 0805 SMD, Green"
LED2 LED3: library part LED_SMD_Red_0805, "LED, 0805 SMD, Red"
P1: "Header, 10-Pin, Dual row"
P2 P5 P6 P7 P8: "Header, 3-Pin"
P3 P4: "Header, 2-Pin"
P9: "Header, 4-Pin"
P10: "Header, 5-Pin, Dual row"
P11: "Header, 7-Pin, Dual row"
R1: library part CMP-1013-00002-1, "1R 0.125W 5% 0805 (2012 Metric)  SMD"
R2 R4: library part CMP-1013-00026-1, "10R 0.125W 5% 0805 (2012 Metric)  SMD"
R3 R5 R6 R12 R13 R25 R26 R27 R28 R29 R45: library part CMP-1013-00454-1, "330R 0.125W 1% 0805 (2012 Metric)  SMD"
R7 R9 R10 R15 R16 R17 R18 R19 R46 R47: library part CMP-1013-00122-1, "100K 0.125W 5% 0805 (2012 Metric)  SMD"
R8 R11 R14 R20 R21 R22 R23 R24 R48: library part CMP-1013-00050-1, "100R 0.125W 5% 0805 (2012 Metric)  SMD"
R30 R33 R38 R41: library part CMP-1013-00641-1, "15K 0.125W 1% 0805 (2012 Metric)  SMD"
R31 R32 R39 R40: library part CMP-1013-00510-1, "1K 0.125W 1% 0805 (2012 Metric)  SMD"
R34 R42: library part CMP-1013-00670-1, "27K 0.125W 1% 0805 (2012 Metric)  SMD"
R35 R43: library part CMP-1013-00659-1, "22K 0.125W 1% 0805 (2012 Metric)  SMD"
R36 R37: library part CMP-1013-00699-1, "47K 0.125W 1% 0805 (2012 Metric)  SMD"
R44: library part CMP-1013-00586-1, "4K7 0.125W 1% 0805 (2012 Metric)  SMD"
U3: "USB UART Asynchronous Serial Data Transfer Chip, SSOP-28, Tape and Reel"
X1: library part MC-306

## Via types
v1: diameter 0.4, hole 0.2, Top Layer to Bottom Layer, 586 vias

## Nets (pads, with @x,y where several pads share a name; then routed paths per layer and width w, separated by ;. In a path a pad name is that pad's centre, name@x,y a point inside that pad or via, vN(x,y) a via of type N, cw(c..) or ccw(c..) an arc to the next point about the centre after c; other vN are vias at no path point)
ARM_HFXTAL_N: C44.1 GG.L9 X2.3 | length 49.8
  Top Layer w0.1: v1(107.798,142.469) 108.179,142.85 GG.L9@108.8,142.85 ; v1(150.292,142.9) 150.3,142.892 X2.3@150.3,141.6
  Mid-Layer 1 w0.1: v1(107.798,142.469) 109.017,141.249 115.037,141.249 117.475,138.811 v1(120.752,138.811)
  MidLayer3 w0.1: v1(120.752,138.811) 124.841,142.9 v1(150.292,142.9)
  Bottom Layer w0.1: C44.1@150,141.4 150,142.609 v1(150.292,142.9)